# Altium PCB Communication_board.PcbDoc (part 1 of 2)
Units mm, origin at the board's own origin, x right, y up, seen from the top; angles counter-clockwise.
Board outline 123 x 68.2 mm, 6 copper layers (Top Layer, Mid-Layer 1, Internal Plane 1, Mid-Layer 2, Mid-Layer 3, Bottom Layer); 199 components, 176 nets, 1115 pads, 336 vias.
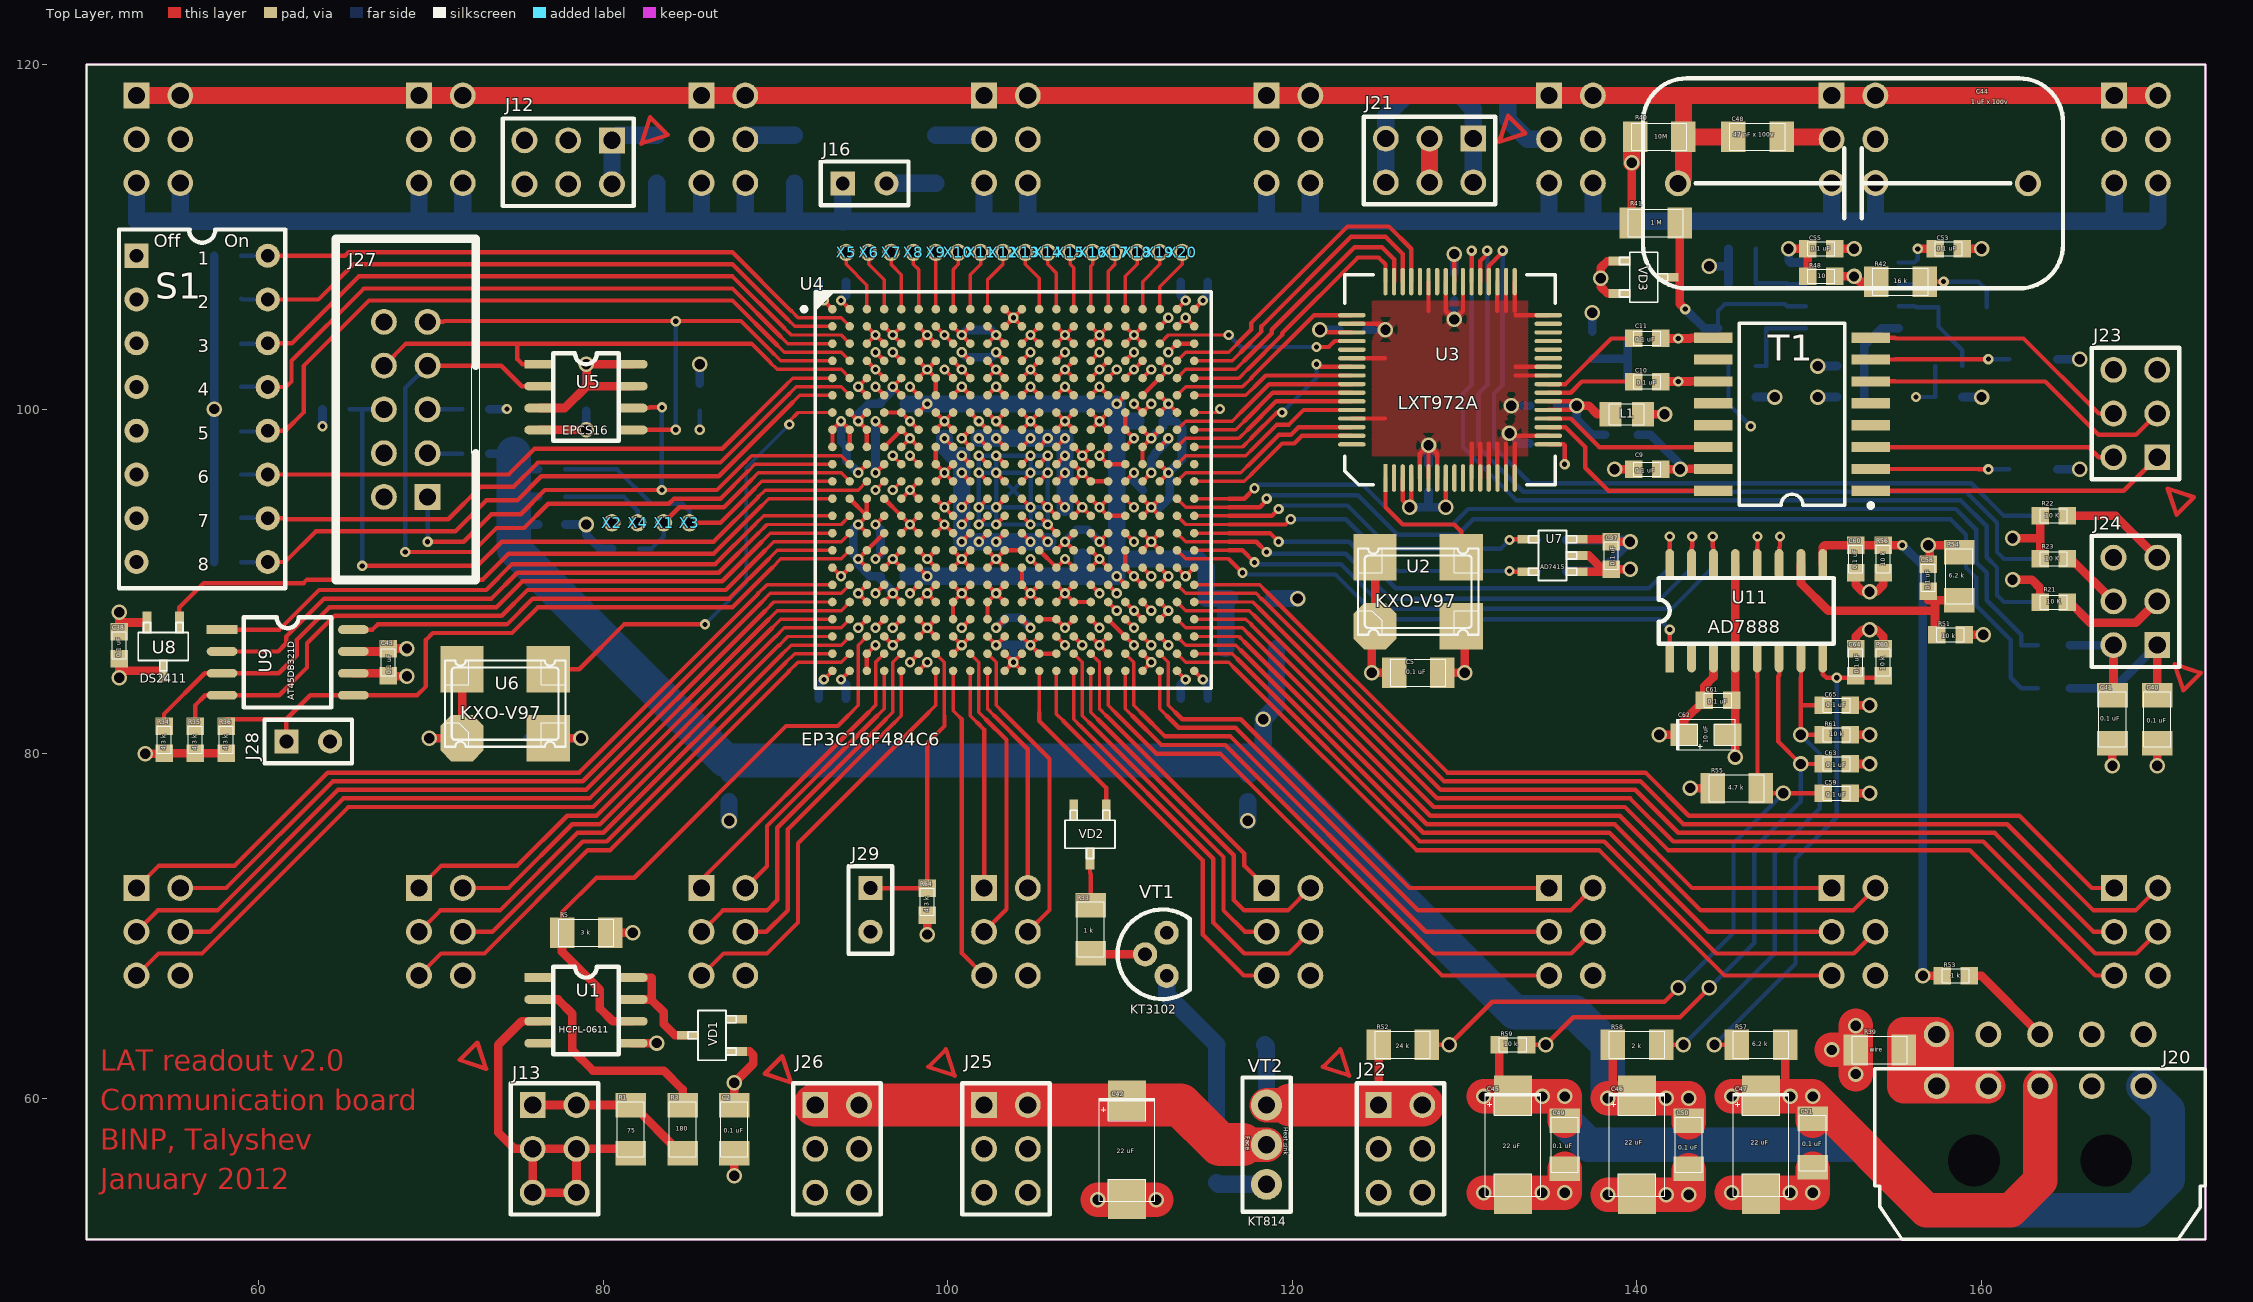
[diagram p0: Top Layer view]
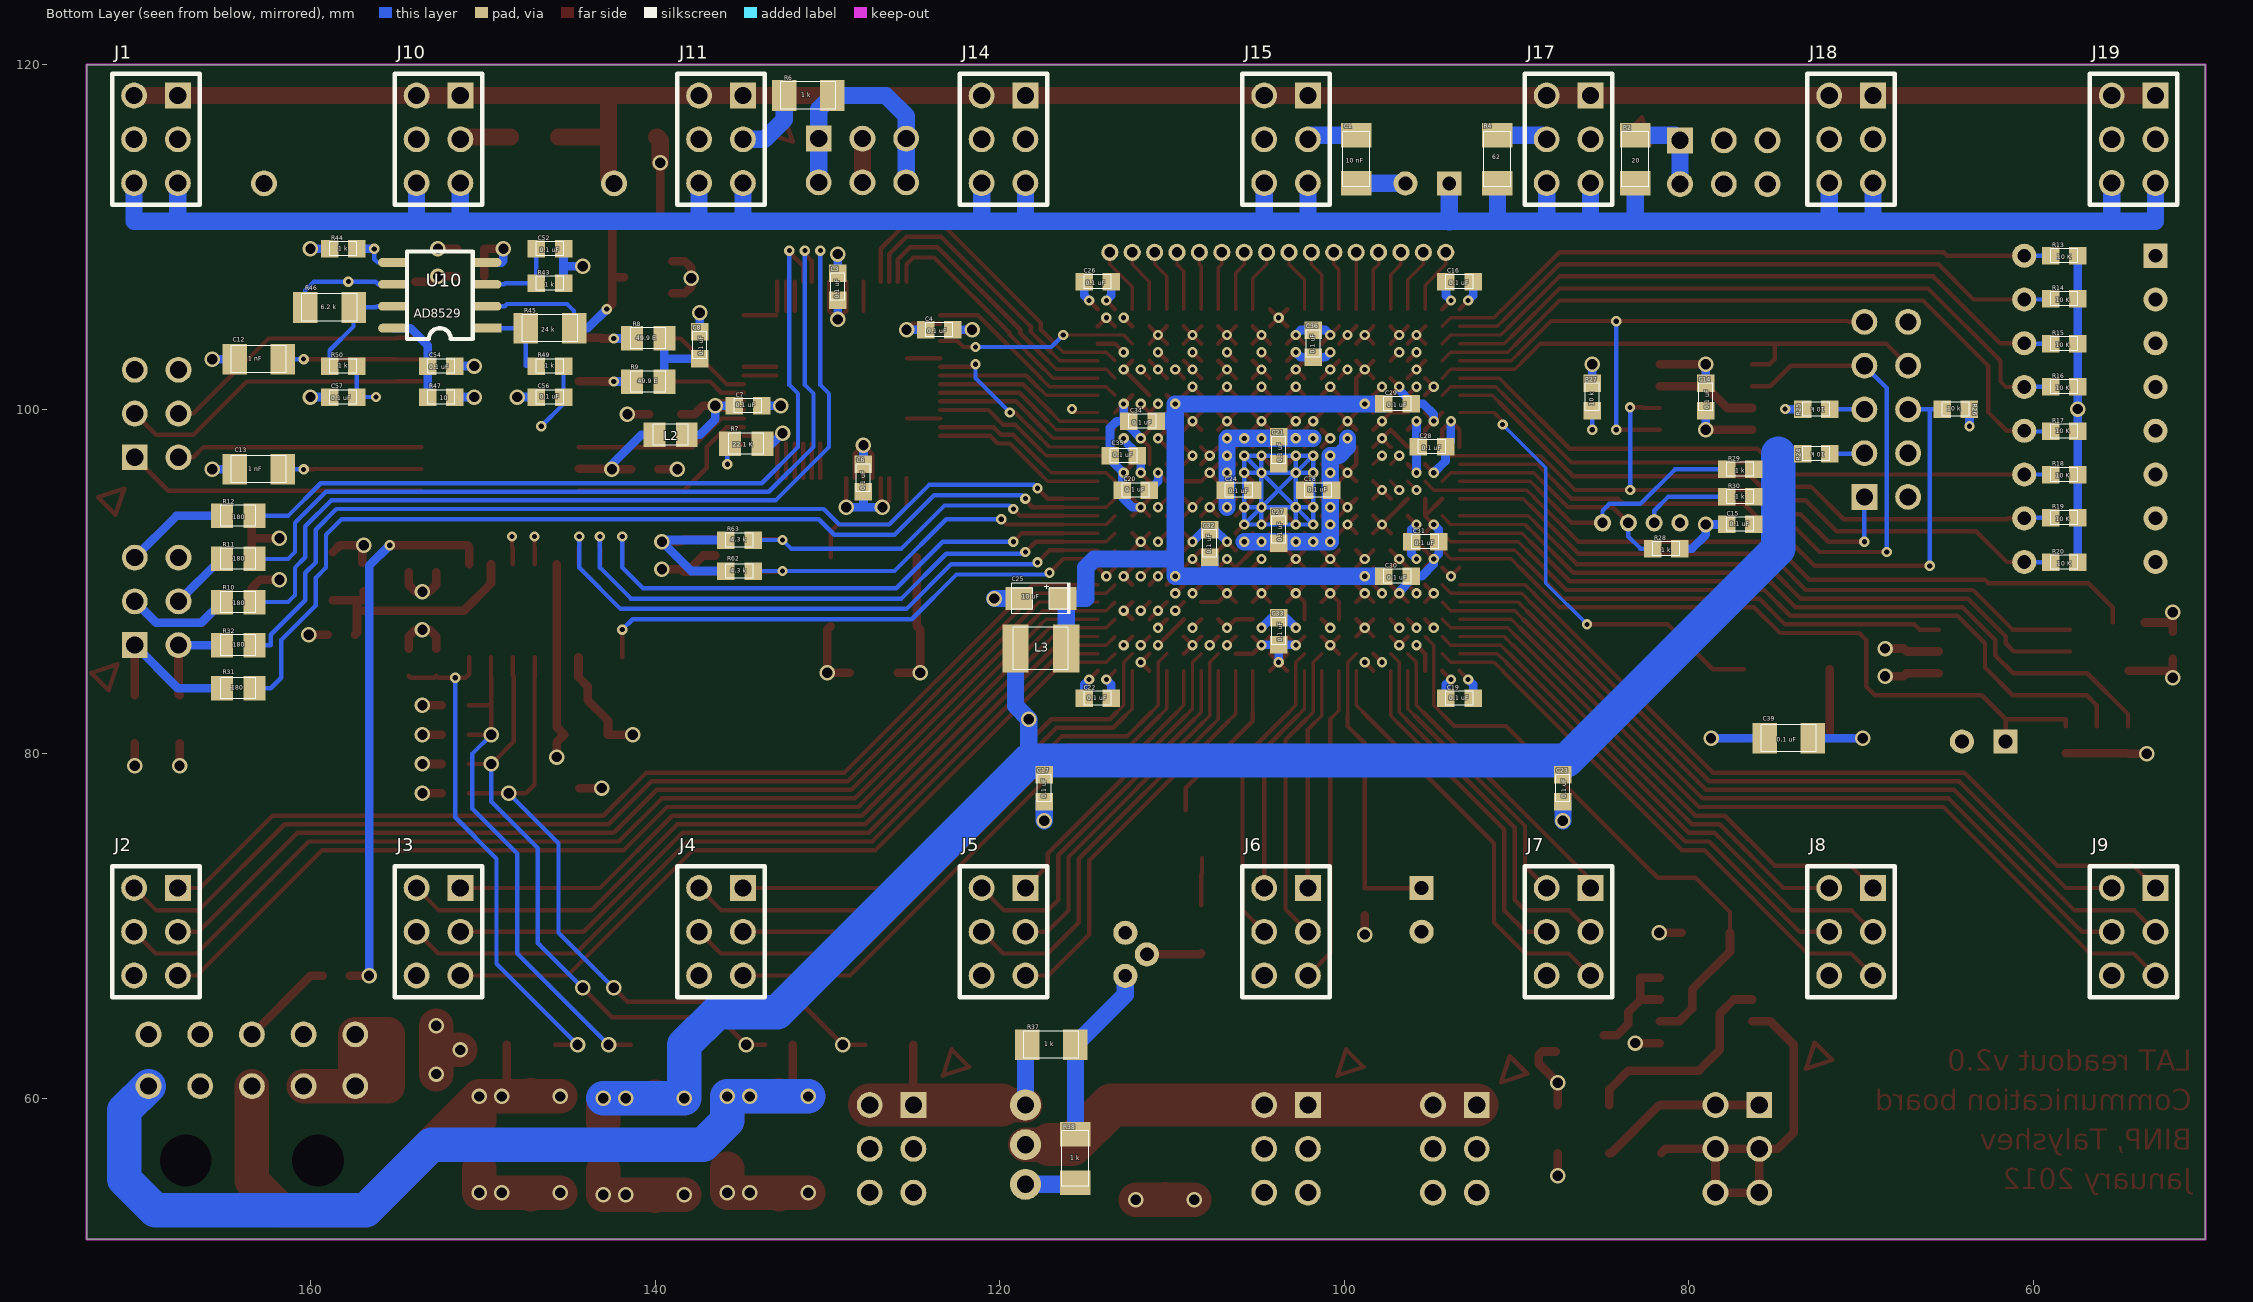
[diagram p1: Bottom Layer view, seen from below]
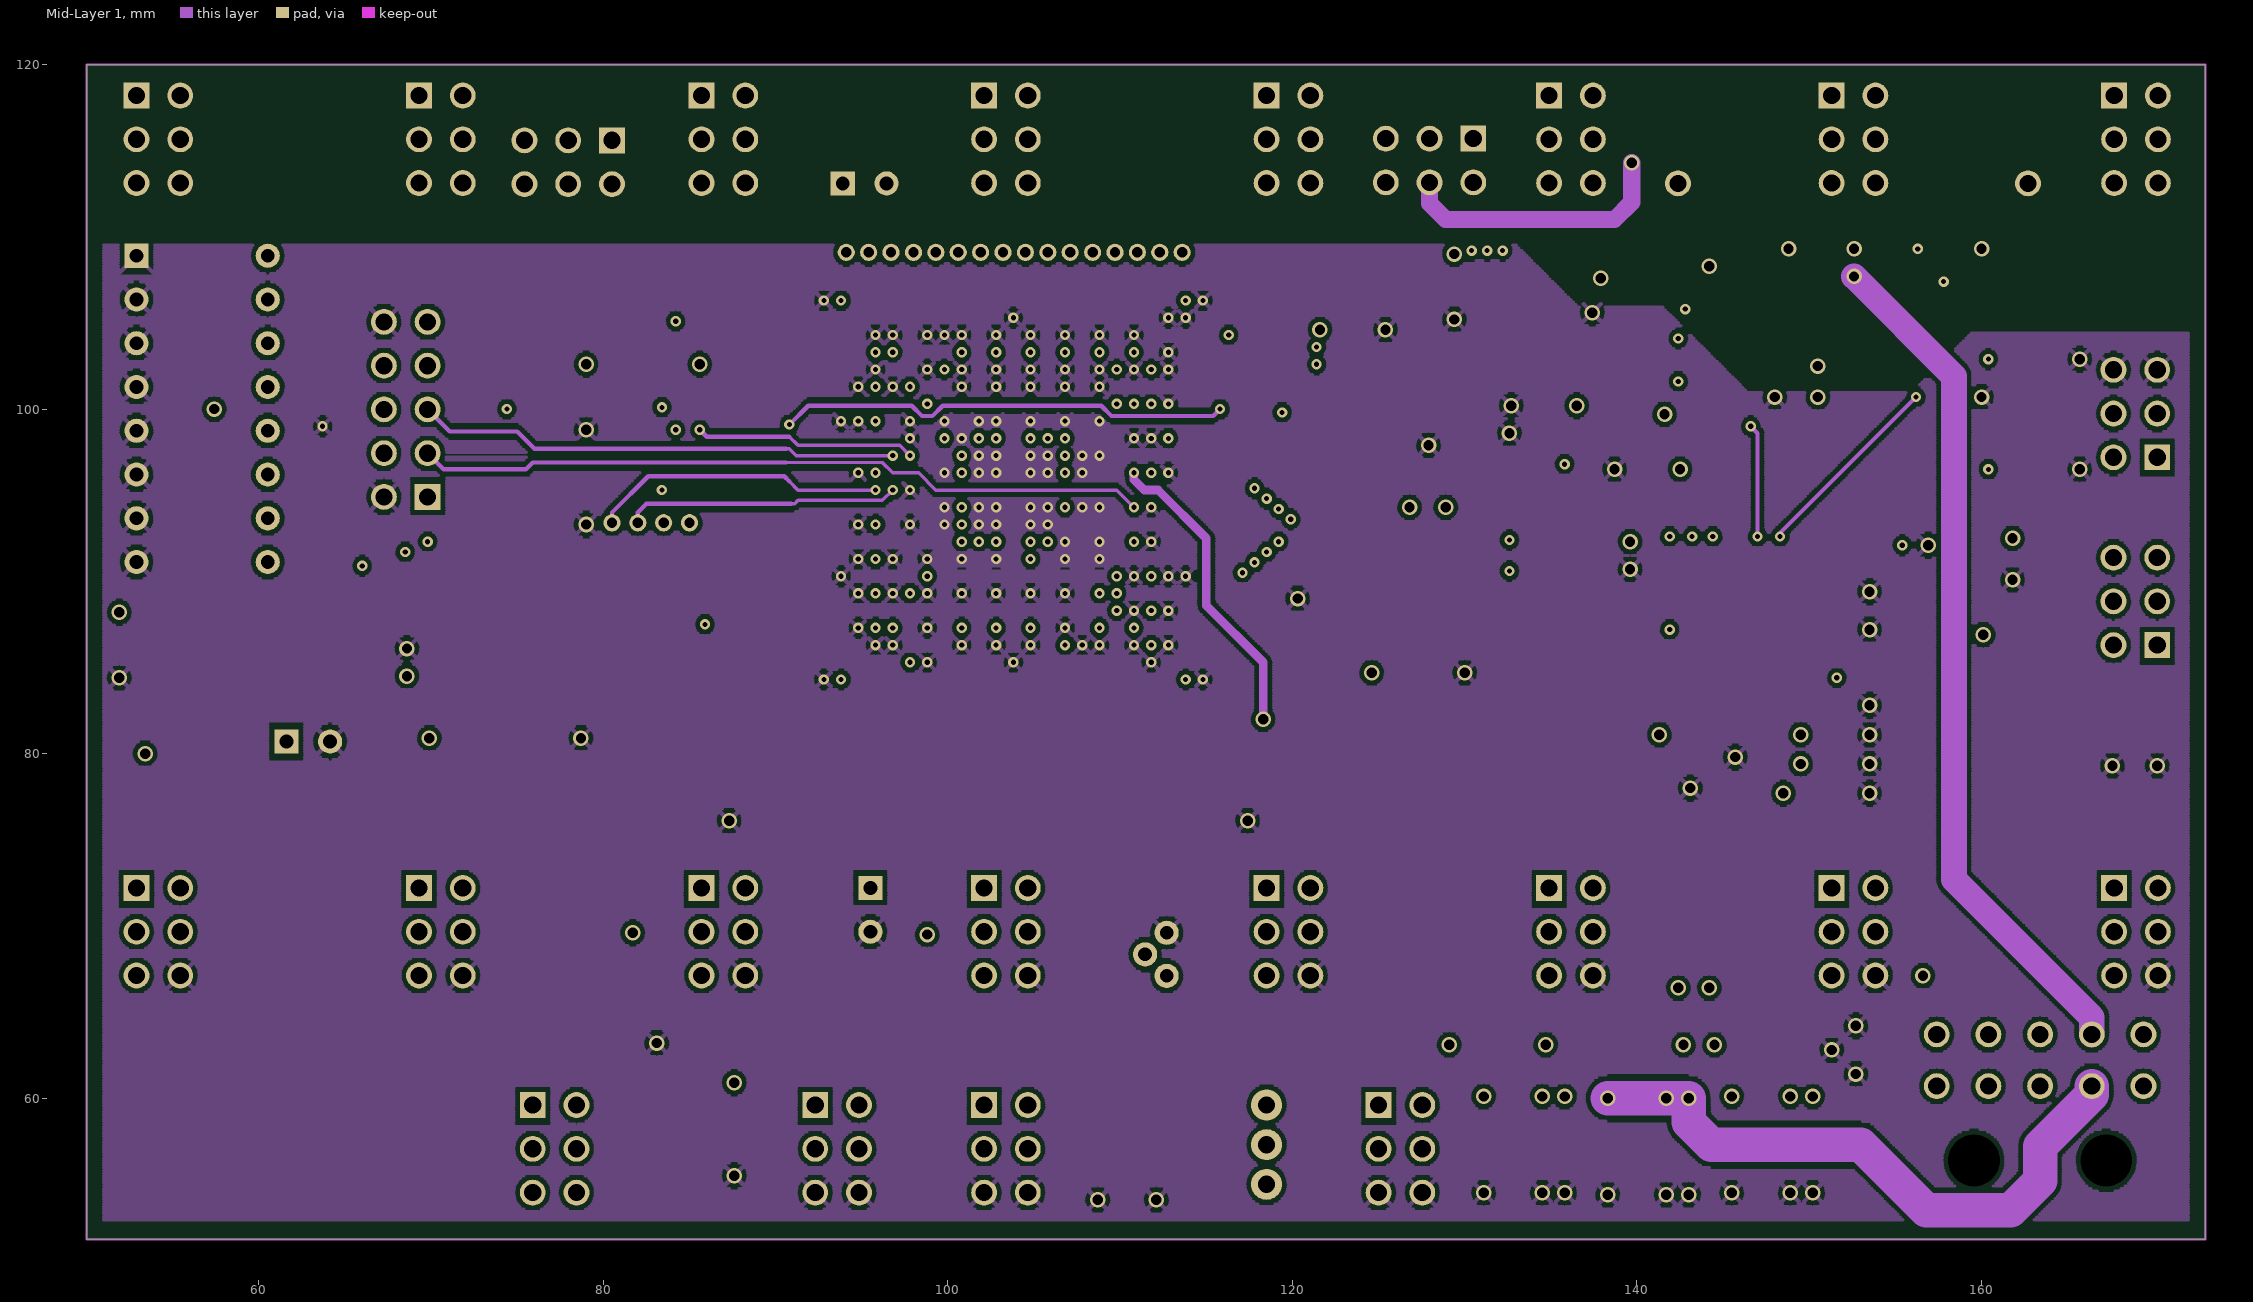
[diagram p2: Mid-Layer 1]
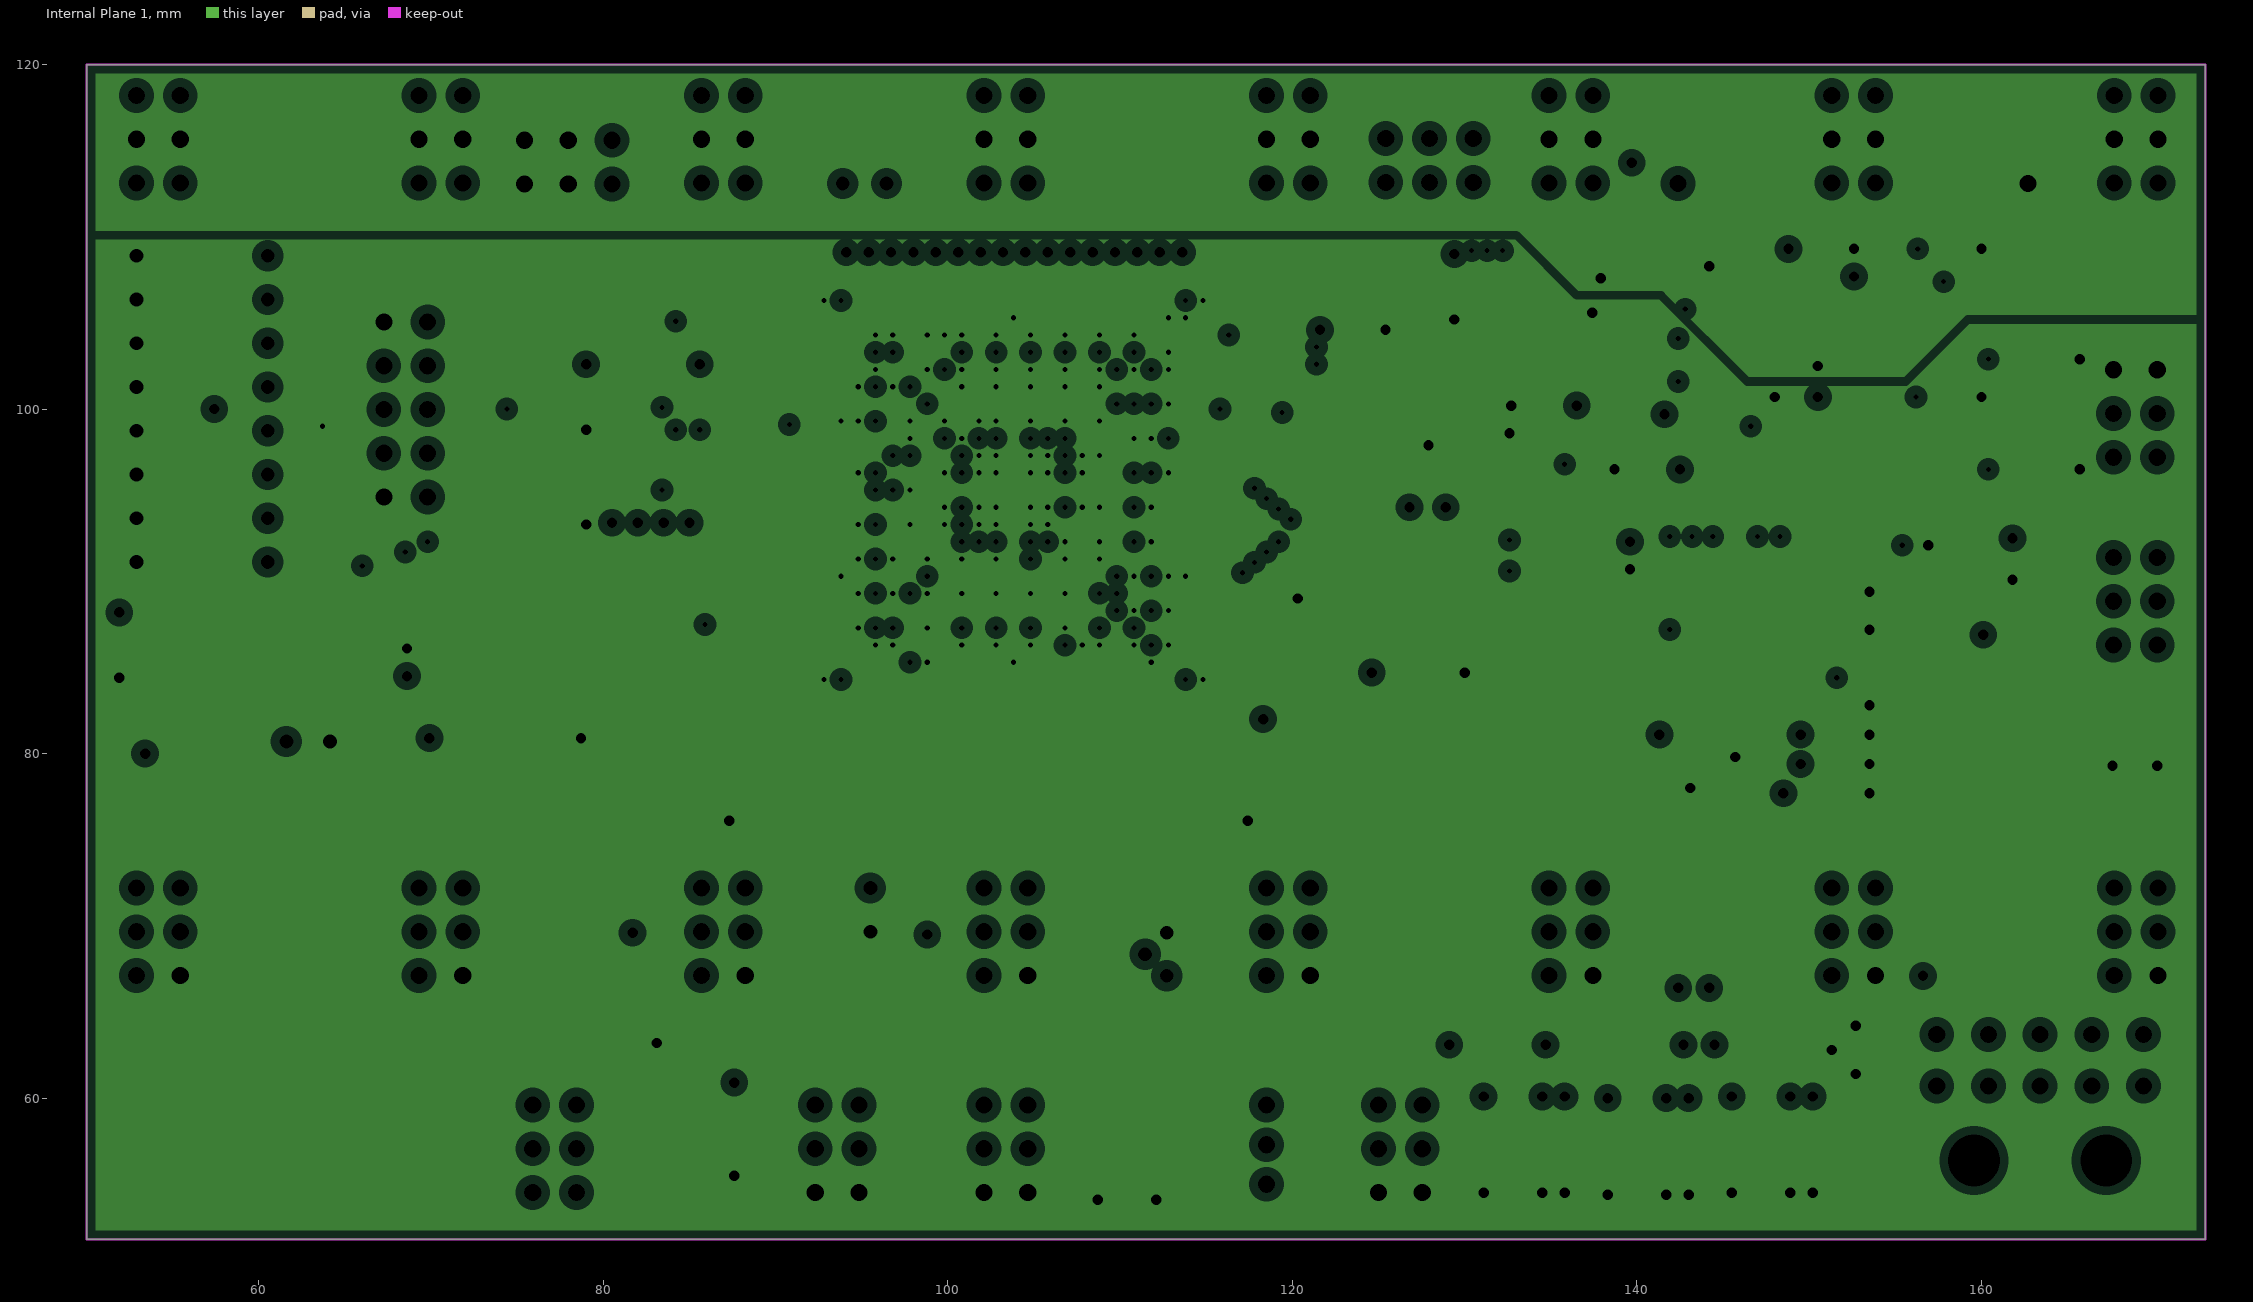
[diagram p3: Internal Plane 1, clearances drawn from the general rule]
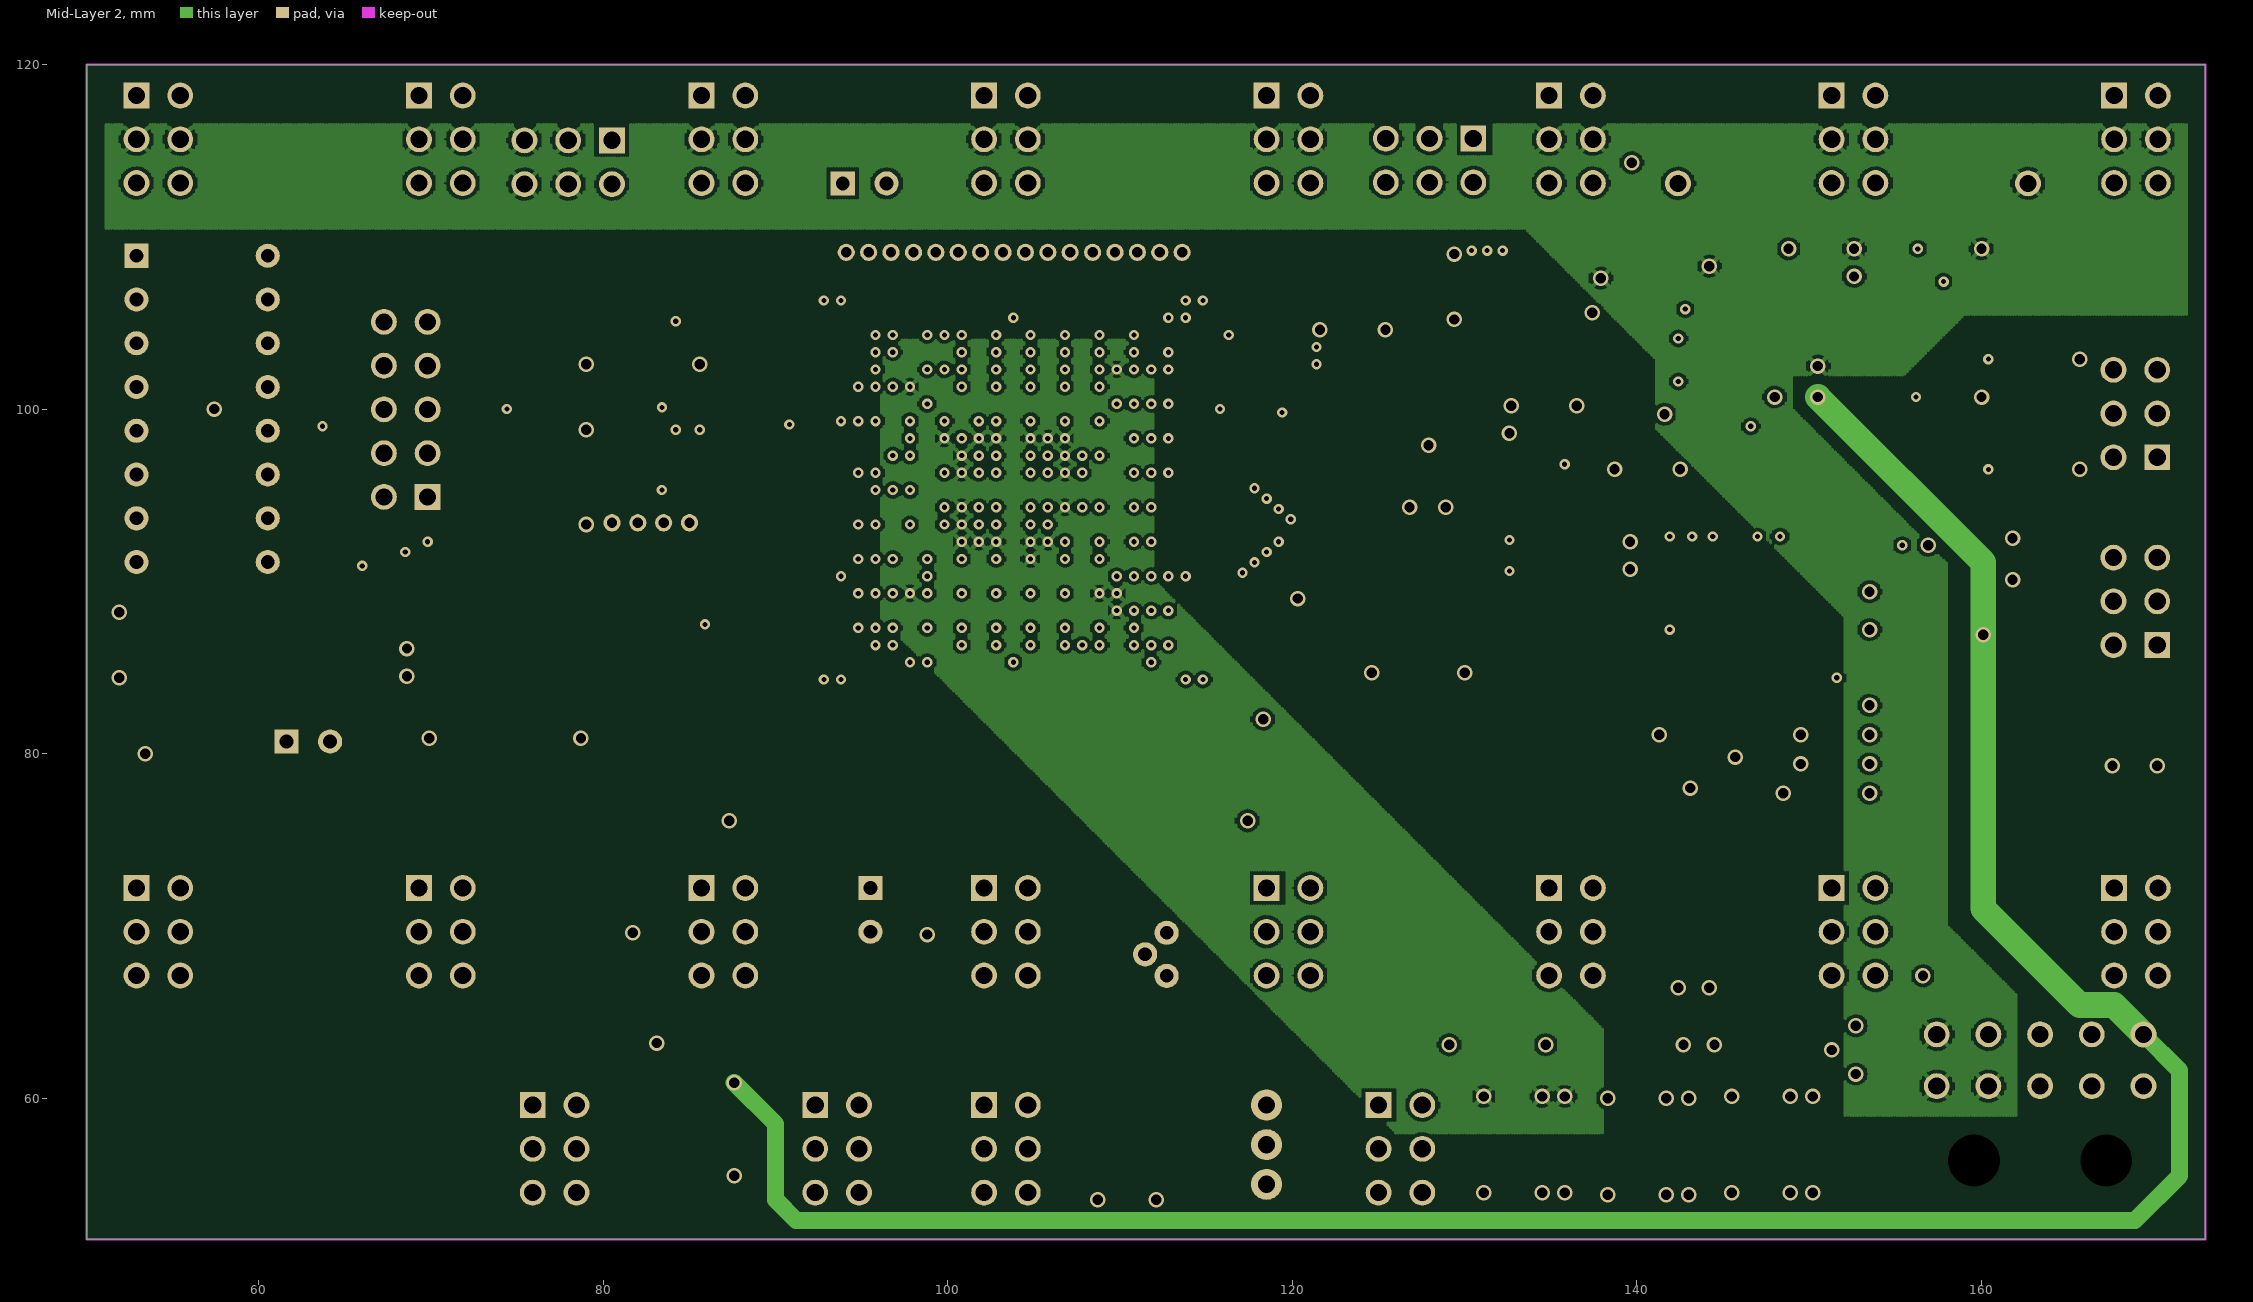
[diagram p4: Mid-Layer 2]
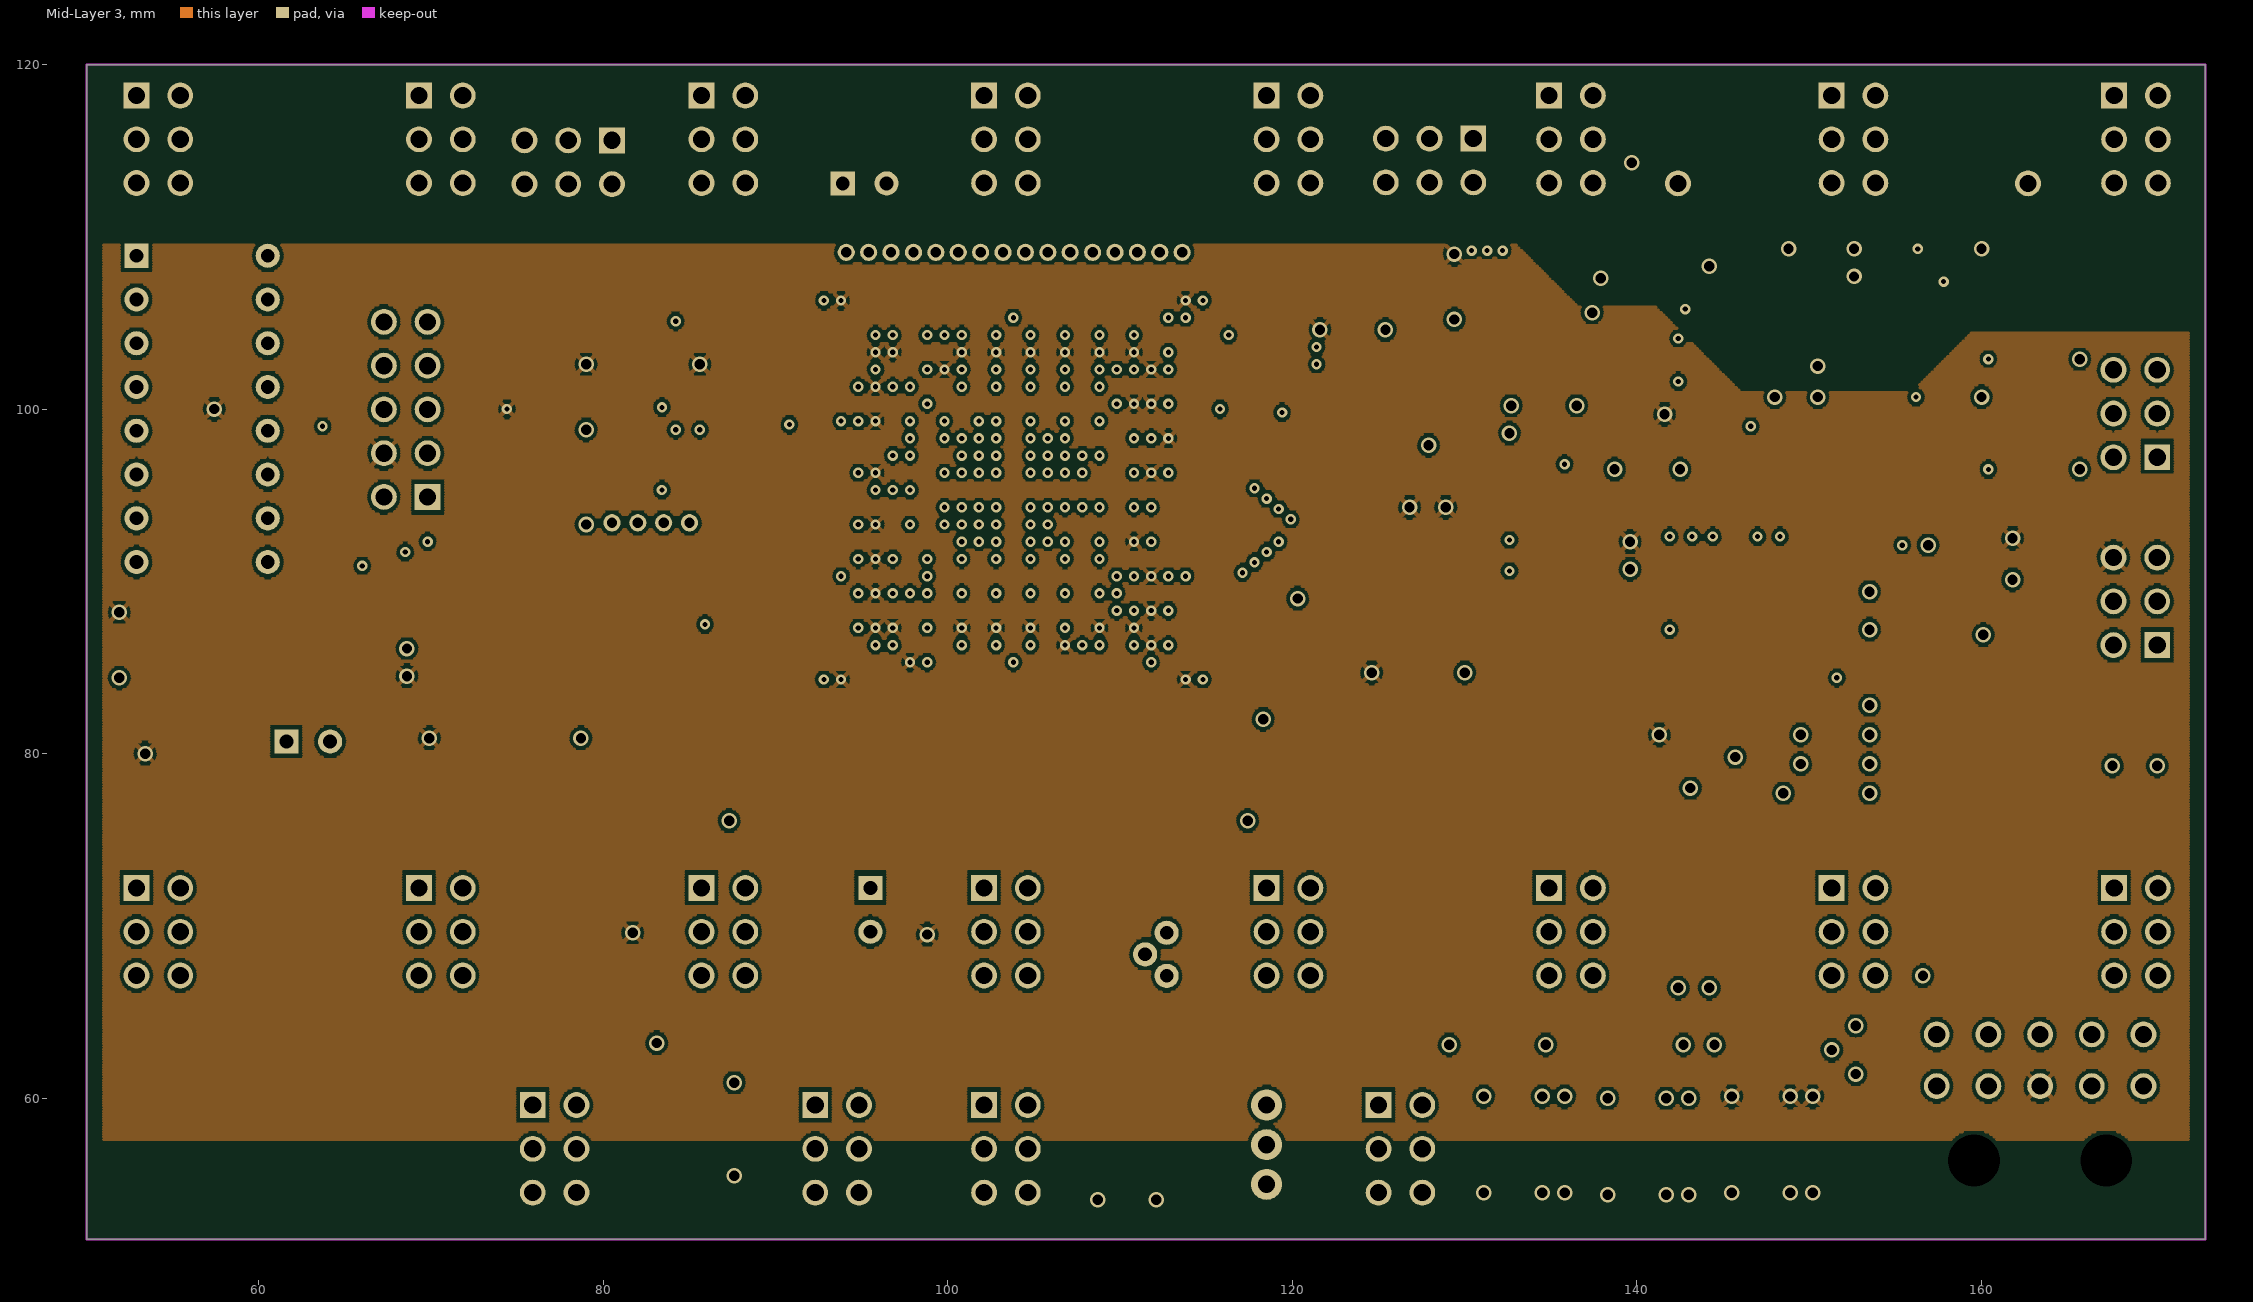
[diagram p5: Mid-Layer 3]

## Layer stack, top to bottom
Top Layer: signal copper 0.0356
Dielectric: core 0.32, FR-4, Dk 4.8
Mid-Layer 1: signal copper 0.0356
Dielectric: prepreg 0.32, FR-4, Dk 4.8
Internal Plane 1: plane copper 0.0356, net GND
Dielectric: core 0.32, FR-4, Dk 4.8
Mid-Layer 2: signal copper 0.0356
Dielectric: prepreg 0.32, FR-4, Dk 4.8
Mid-Layer 3: signal copper 0.0356
Dielectric: core 0.32, FR-4, Dk 4.8
Bottom Layer: signal copper 0.0356

## Board outline
50,51.8 50,120 173,120 173,51.8 50,51.8

## Design rules (kind name [scope] priority, off if disabled: settings)
Clearance Clearance_mid1_poly [(InPolygon AND OnLayer('Mid-Layer 1')) vs (OnLayer('Mid-Layer 1') OR OnLayer('Multi-Layer'))] p1: gap=0.254
Clearance Clearance_bottom_poly [(InPolygon AND OnLayer('Bottom Layer')) vs (OnLayer('Bottom Layer') OR OnLayer('Multi-Layer'))] p2: gap=0.254
Clearance Clearance_top_poly [(InPolygon AND OnLayer('Top Layer')) vs (OnLayer('Top Layer') OR OnLayer('Multi-Layer'))] p3: gap=0.254
Clearance Clearance_int1 [OnLayer('Internal Plane 1') vs (OnLayer('Internal Plane 1') OR OnLayer('Multi-Layer'))] p4: gap=0.2
Clearance Clearance_bot [OnLayer('Bottom Layer') vs (OnLayer('Bottom Layer') OR OnLayer('Multi-Layer'))] p5: gap=0.12
Clearance Clearance_mid3 [OnLayer('Mid-Layer 3') vs (OnLayer('Mid-Layer 3') OR OnLayer('Multi-Layer'))] p6: gap=0.2
Clearance Clearance_mid2 [OnLayer('Mid-Layer 2') vs (OnLayer('Mid-Layer 2') OR OnLayer('Multi-Layer'))] p7: gap=0.2
Clearance Clearance_mid1 [OnLayer('Mid-Layer 1') vs (OnLayer('Mid-Layer 1') OR OnLayer('Multi-Layer'))] p8: gap=0.2
Clearance Clearance_top [OnLayer('Top Layer') vs (OnLayer('Top Layer') OR OnLayer('Multi-Layer'))] p9: gap=0.12
HoleSize [All] p1: absolutevalues=TRUE maxlimit=3.048 minlimit=0.025 maxpercent=80.000 minpercent=20.000
MinimumSolderMaskSliver [All] p1: minsoldermaskwidth=0.178
PlaneClearance [All] p1: clearance=0.508
PlaneConnect [All] p1: planeconnectstyle=Relief reliefexpansion=0.508 reliefentries=4 reliefconductorwidth=0.254 reliefairgap=0.254
PolygonConnect [All] p1: connectstyle=Relief reliefconductorwidth=0.254 reliefentries=4 polygonreliefangle="45 Angle"
RoomDefinition PowerMeasure [InComponentClass('PowerMeasure')] p1: confinementstyle=ConfineOut formatcopy=TRUE lockcomponents=FALSE outline 81.28,162.56 109.22,162.56 109.22,167.64 81.28,167.64
RoomDefinition Power [InComponentClass('Power')] p2: confinementstyle=ConfineOut formatcopy=TRUE lockcomponents=FALSE outline 81.28,154.94 109.22,154.94 109.22,160.02 81.28,160.02
RoomDefinition Misc [InComponentClass('Misc')] p3: confinementstyle=ConfineOut formatcopy=TRUE lockcomponents=FALSE outline 81.28,170.18 109.22,170.18 109.22,175.26 81.28,175.26
RoomDefinition FPGA [InComponentClass('FPGA')] p4: confinementstyle=ConfineOut formatcopy=TRUE lockcomponents=FALSE outline 50.8,162.56 78.74,162.56 78.74,167.64 50.8,167.64
RoomDefinition Ethernet [InComponentClass('Ethernet')] p5: confinementstyle=ConfineOut formatcopy=TRUE lockcomponents=FALSE outline 50.8,154.94 78.74,154.94 78.74,160.02 50.8,160.02
RoomDefinition DigitalPart [InComponentClass('DigitalPart')] p6: confinementstyle=ConfineOut formatcopy=TRUE lockcomponents=FALSE outline 50.8,170.18 78.74,170.18 78.74,175.26 50.8,175.26
RoutingVias [All] p1: holewidth=0.3 width=0.6 viastyle="Through Hole" minholewidth=0.25 minwidth=0.5 maxholewidth=3 maxwidth=4
SilkToSilkClearance [All] p1: silktosilkclearance=0.025
SilkscreenOverComponentPads [All] p1: minsilkscreentomaskgap=0.102
SolderMaskExpansion [All] p1: expansion=0.102
Width [All] p1: maxlimit=10.16 minlimit=0.2 preferedwidth=0.508
22 further rules are at their usual default settings.

## Classes and differential pairs
net class ETHTXD[3..0]: ETHTXD0 ETHTXD1 ETHTXD2 ETHTXD3
net class ETHRXD[3..0]: ETHRXD0 ETHRXD1 ETHRXD2 ETHRXD3
net class ETHADDRSELECT[7..0]: ETHADDRSELECT0 ETHADDRSELECT1 ETHADDRSELECT2 ETHADDRSELECT3 ETHADDRSELECT4 ETHADDRSELECT5 ETHADDRSELECT6 ETHADDRSELECT7
component class Power: C44 C45 C46 C47 C48 C49 C50 C51 R39 R40
component class PowerMeasure: C52 C53 C54 C55 C56 C57 C58 C59 C60 C61 C62 C63 C64 C65 R41 R42 R43 R44 R45 R46 R47 R48 R49 R50 R51 R52 R53 R54 R55 R56 R57 R58 R59 R60 R61 U10 U11 VD3
component class Misc: C37 C38 C39 C40 C41 C42 C43 J28 R31 R32 R33 R34 R35 R36 R37 R38 R62 R63 U6 U7 U8 U9 VD2 VT1 VT2
component class FPGA: C14 C15 C16 C17 C18 C19 C20 C21 C22 C23 C24 C25 C26 C27 C28 C29 C30 C31 C32 C33 C34 C35 C36 J27 L3 R24 R25 R26 R27 R28 R29 R30 U4 U5 X1 X2 X3 X4 X5 X6 X7 X8 X9 X10 X11 X12 X13 X14 X15 X16 X17 X18 X19 X20
component class Ethernet: C3 C4 C5 C6 C7 C8 C9 C10 C11 C12 C13 L1 L2 R7 R8 R9 R10 R11 R12 R13 R14 R15 R16 R17 R18 R19 R20 R21 R22 R23 S1 T1 U2 U3
component class DigitalPart: C1 C2 J1 J2 J3 J4 J5 J6 J7 J8 J9 J10 J11 J12 J13 J14 J15 J16 J17 J18 J19 J20 J21 J22 J23 J24 J25 J26 J29 R1 R2 R3 R4 R5 R6 R64 U1 VD1

## Components (designator, comment, footprint, x,y, rotation, side; value= is the part's Value field where it differs from the comment)
C1 "10 nF" 1206 99.3,114.5 r270 bottom
C2 "0.1 uF" 1206 87.6,58.2 r90 top
C3 "0.1 uF" 0603 129.4,107.1 r90 bottom
C4 "0.1 uF" 0603 123.5,104.6 r180 bottom
C5 "0.1 uF" 1206 127.3,84.7 r180 top
C6 "0.1 uF" 0603 127.9,96 r270 bottom
C7 "0.1 uF" 0603 134.6,100.2 r0 bottom
C8 "0.1 uF" 0603 137.4,103.7 r90 bottom
C9 "0.1 uF" 0603 140.6,96.5 r0 top
C10 "0.1 uF" 0603 140.6,101.6 r180 top
C11 "0.1 uF" 0603 140.6,104.1 r180 top
C12 "1 nF" 1206 163,102.9 r0 bottom
C13 "1 nF" 1206 163,96.5 r180 bottom
C14 "0.1 uF" 0603 79,100.7 r90 bottom
C15 "0.1 uF" 0603 77,93.3 r180 bottom
C16 "0.1 uF" 0603 93.3,107.4 r0 bottom
C17 "0.1 uF" 0603 117.4,78 r90 bottom
C18 "0.1 uF" 0603 101.5,95.3 r180 bottom
C19 "0.1 uF" 0603 93.3,83.2 r0 bottom
C20 "0.1 uF" 0603 112.1,95.3 r180 bottom
C21 "0.1 uF" 0603 103.8,97.6 r90 bottom
C22 "0.1 uF" 0603 114.3,83.2 r180 bottom
C23 "0.1 uF" 0603 87.3,78 r90 bottom
C24 "0.1 uF" 0603 106.1,95.3 r0 bottom
C25 "10 uF" CP3216 117.6,89 r0 bottom
C26 "0.1 uF" 0603 114.3,107.4 r180 bottom
C27 "0.1 uF" 0603 103.8,93 r270 bottom
C28 "0.1 uF" 0603 94.9,97.8 r0 bottom
C29 "0.1 uF" 0603 96.9,100.3 r0 bottom
C30 "0.1 uF" 0603 96.9,90.3 r0 bottom
C31 "0.1 uF" 0603 95.3,92.3 r0 bottom
C32 "0.1 uF" 0603 107.8,92.2 r270 bottom
C33 "0.1 uF" 0603 103.8,87.1 r90 bottom
C34 "0.1 uF" 0603 111.7,99.3 r180 bottom
C35 "0.1 uF" 0603 112.8,97.3 r180 bottom
C36 "0.1 uF" 0603 101.8,103.8 r270 bottom
C37 "0.1 uF" 0603 138.5,91.5 r90 top
C38 "0.1 uF" 0603 51.9,86.3 r90 top
C39 "0.1 uF" 1206 74.2,80.9 r180 bottom
C40 "0.1 uF" 1206 170.2,82 r90 top
C41 "0.1 uF" 1206 167.6,82 r270 top
C42 "22 uF" CP6032 110.4,57 r270 top
C43 "0.1 uF" 0603 67.5,85.3 r90 top
C44 "1 uF x 100v" CAP4 162.7,113.1 r180 top
C45 "22 uF" CP6032 132.8,57.3 r270 top
C46 "22 uF" CP6032 140,57.3 r270 top
C47 "22 uF" CP6032 147.2,57.3 r270 top
C48 "47 nF x 100v" 1206 147,115.8 r180 top
C49 "0.1 uF" 1206 135.8,57.3 r90 top
C50 "0.1 uF" 1206 143,57.3 r90 top
C51 "0.1 uF" 1206 150.2,57.4 r90 top
C52 "0.1 uF" 0603 146.1,109.3 r0 bottom
C53 "0.1 uF" 0603 158.1,109.3 r180 top
C54 "0.1 uF" 0603 152.4,102.5 r0 bottom
C55 "0.1 uF" 0603 150.7,109.3 r180 top
C56 "0.1 uF" 0603 146.1,100.7 r180 bottom
C57 "0.1 uF" 0603 158.1,100.7 r180 bottom
C58 "0.1 uF" 0603 156.9,90.2 r270 top
C59 "0.1 uF" 0603 151.6,77.7 r180 top
C60 "0.1 uF" 0603 152.7,91.3 r90 top
C61 "0.1 uF" 0603 144.7,83.1 r180 top
C62 "10 uF" CP3216 144,81.1 r0 top
C63 "0.1 uF" 0603 151.6,79.4 r180 top
C64 "0.1 uF" 0603 152.7,85.3 r270 top
C65 "0.1 uF" 0603 151.6,82.8 r180 top
J1 "PBD-6" PBD-6 167.7,118.2 r180 bottom
J2 "PBD-6" PBD-6 167.7,72.2 r180 bottom
J3 "PBD-6" PBD-6 151.3,72.2 r180 bottom
J4 "PBD-6" PBD-6 134.9,72.2 r180 bottom
J5 "PBD-6" PBD-6 118.5,72.2 r180 bottom
J6 "PBD-6" PBD-6 102.1,72.2 r180 bottom
J7 "PBD-6" PBD-6 85.7,72.2 r180 bottom
J8 "PBD-6" PBD-6 69.3,72.2 r180 bottom
J9 "PBD-6" PBD-6 52.9,72.2 r180 bottom
J10 "PBD-6" PBD-6 151.3,118.2 r180 bottom
J11 "PBD-6" PBD-6 134.9,118.2 r180 bottom
J12 "PLD-6" PLD-6 80.5,115.6 r270 top
J13 "PLD-6" PLD-6 75.9,59.6 r0 top
J14 "PBD-6" PBD-6 118.5,118.2 r180 bottom
J15 "PBD-6" PBD-6 102.1,118.2 r180 bottom
J16 "JUMPER 1-2" 2SIP 93.9,113.1 r90 top
J17 "PBD-6" PBD-6 85.7,118.2 r180 bottom
J18 "PBD-6" PBD-6 69.3,118.2 r180 bottom
J19 "PBD-6" PBD-6 52.9,118.2 r180 bottom
J20 "MICROFIT-10" MICROFIT10 169.4,60.7 r0 top
J21 "PLD-6" PLD-6 130.5,115.7 r270 top
J22 "PLD-6" PLD-6 125,59.6 r0 top
J23 "PLD-6" PLD-6 170.2,97.2 r180 top
J24 "PLD-6" PLD-6 170.2,86.3 r180 top
J25 "PLD-6" PLD-6 102.1,59.6 r0 top
J26 "PLD-6" PLD-6 92.3,59.6 r0 top
J27 "BH-10" BH10 69.8,94.9 r180 top
J28 "JUMPER 1-2" 2SIP 61.6,80.7 r90 top
J29 "JUMPER 1-2" 2SIP 95.5,72.2 r0 top
L1 "Inductor" 0805 139.4,99.7 r180 top
L2 "Inductor" 0805 139.1,98.5 r0 bottom
L3 "LQH32 100mkH" 1210 117.6,86.1 r180 bottom
R1 "75" 1206 81.6,58.2 r90 top
R2 "20" 1206 83.1,114.5 r270 bottom
R3 "180" 1206 84.6,58.2 r270 top
R4 "62" 1206 91.1,114.5 r270 bottom
R5 "3 k" 1206 79,69.6 r180 top
R6 "1 k" 1206 131.1,118.2 r0 bottom
R7 "22.1 K" 0805 134.7,98 r180 bottom
R8 "49.9 E" 0805 140.4,104.1 r0 bottom
R9 "49.9 E" 0805 140.4,101.6 r180 bottom
R10 "180" 0805 164.2,88.8 r0 bottom
R11 "180" 0805 164.2,91.3 r0 bottom
R12 "180" 0805 164.2,93.8 r0 bottom
R13 "10 K" 0603 58.2,108.9 r180 bottom
R14 "10 K" 0603 58.2,106.4 r180 bottom
R15 "10 K" 0603 58.2,103.8 r180 bottom
R16 "10 K" 0603 58.2,101.3 r180 bottom
R17 "10 K" 0603 58.2,98.7 r180 bottom
R18 "10 K" 0603 58.2,96.2 r180 bottom
R19 "10 K" 0603 58.2,93.7 r180 bottom
R20 "10 K" 0603 58.2,91.1 r180 bottom
R21 "10 K" 0603 164.2,88.8 r180 top
R22 "10 K" 0603 164.2,93.8 r0 top
R23 "10 K" 0603 164.2,91.3 r0 top
R24 "10 k" 0603 72.6,97.4 r0 bottom
R25 "10 k" 0603 72.6,100 r0 bottom
R26 "10 k" 0603 64.5,100 r180 bottom
R27 "10 k" 0603 85.6,100.7 r90 bottom
R28 "1 k" 0603 81.3,91.9 r180 bottom
R29 "1 k" 0603 77,96.5 r180 bottom
R30 "1 k" 0603 77,94.9 r180 bottom
R31 "180" 0805 164.2,83.8 r0 bottom
R32 "180" 0805 164.2,86.3 r0 bottom
R33 "1 k" 1206 108.3,69.8 r270 top
R34 "4.3 k" 0603 54.5,80.8 r270 top
R35 "4.3 k" 0603 56.3,80.8 r270 top
R36 "4.3 k" 0603 58.1,80.8 r270 top
R37 "1 k" 1206 117,63.1 r0 bottom
R38 "1 k" 1206 115.6,56.5 r270 bottom
R39 "wire" 1206 154.103,62.797 r0 top
R40 "10M" 1206 141.3,115.8 r0 top
R41 "1 M" 1206 141.1,110.8 r0 top
R42 "16 k" 1206 155.3,107.4 r0 top
R43 "1 k" 0603 146.1,107.3 r0 bottom
R44 "1 k" 0603 158.1,109.3 r180 bottom
R45 "24 k" 1206 146.1,104.7 r0 bottom
R46 "6.2 k" 1206 158.9,105.9 r180 bottom
R47 "10" 0603 152.4,100.7 r0 bottom
R48 "10" 0603 150.7,107.7 r180 top
R49 "1 k" 0603 146.1,102.5 r0 bottom
R50 "1 k" 0603 158.1,102.5 r180 bottom
R51 "10 k" 0603 158.2,86.9 r0 top
R52 "24 k" 1206 126.4,63.1 r180 top
R53 "1 k" 0603 158.5,67.1 r0 top
R54 "6.2 k" 1206 158.7,90.3 r270 top
R55 "4.7 k" 1206 145.8,78 r0 top
R56 "10 k" 0603 154.3,91.3 r90 top
R57 "6.2 k" 1206 147.2,63.1 r0 top
R58 "2 k" 1206 140,63.1 r180 top
R59 "10 k" 0603 132.8,63.1 r180 top
R60 "10 k" 0603 154.3,85.3 r270 top
R61 "10 k" 0603 151.6,81.1 r180 top
R62 "4.3 k" 0603 135.1,90.6 r0 bottom
R63 "4.3 k" 0603 135.1,92.4 r0 bottom
R64 "4.3 k" 0603 98.8,71.4 r90 top
S1 "SW DIP8" SWD1-8 52.9,108.9 r0 top
T1 "TG110-S050N2" SO-G16/G6.9 149,99.7 r90 top
U1 "HCPL-0611" 8SOIC150 76.3,67 r0 top
U2 "KXO-V97" KXO-97 124.8,87.4 r0 top
U3 "LXT972A" TQFP64 125.4,96 r90 top
U4 "EP3C16F484C6" FBGA484-3 103.8,95.3 r0 top
U5 "EPCS16" 8SOIC150 76.3,102.6 r0 top
U6 "KXO-V97" KXO-97 71.8,80.9 r0 top
U7 "AD7415" SOT-23-5 136.5,91.5 r90 top
U8 "DS2411" SOT-23 55.9,85.4 r180 top
U9 "AT45DB321D" 8SOIC208 57.865,87.2 r0 top
U10 "AD8529" 8SOIC150 149.8,104.7 r0 bottom
U11 "AD7888" 16SOIC150 141.9,85.6 r90 top
VD1 "BAV99" SOT-23 85.5,62.2 r90 top
VD2 "BAV99" SOT-23 109.7,74.5 r180 top
VD3 "BAV99" SOT-23 141.2,109.1 r270 top
VT1 "KT3102" TRANS-KT3102M 112.7,67.1 r90 top
VT2 "KT814" TRANS-KT814 118.5,57.3 r270 top
X1 "Tmp" DRL06 83.5,93.4 r0 top
X2 "Tmp" DRL06 80.5,93.4 r0 top
X3 "Tmp" DRL06 85,93.4 r0 top
X4 "Tmp" DRL06 82,93.4 r0 top
X5 "Tmp" DRL06 94.1,109.1 r0 top
X6 "Tmp" DRL06 95.4,109.1 r0 top
X7 "Tmp" DRL06 96.7,109.1 r0 top
X8 "Tmp" DRL06 98,109.1 r0 top
X9 "Tmp" DRL06 99.3,109.1 r0 top
X10 "Tmp" DRL06 100.6,109.1 r90 top
X11 "Tmp" DRL06 101.9,109.1 r0 top
X12 "Tmp" DRL06 103.2,109.1 r90 top
X13 "Tmp" DRL06 104.5,109.1 r90 top
X14 "Tmp" DRL06 105.8,109.1 r90 top
X15 "Tmp" DRL06 107.1,109.1 r90 top
X16 "Tmp" DRL06 108.4,109.1 r90 top
X17 "Tmp" DRL06 109.7,109.1 r90 top
X18 "Tmp" DRL06 111,109.1 r90 top
X19 "Tmp" DRL06 112.3,109.1 r90 top
X20 "Tmp" DRL06 113.6,109.1 r90 top

## Footprints (in the part's own frame and the unit in brackets; to place one, negate y for a bottom-side part, rotate by r counter-clockwise, add the part's x,y. Pads: shape width x height; smd on the part's side, far side on the other; paste and mask are expansions set on the pad)
2SIP [mm]
  rect 1.4x1.4 hole 0.8: 1(0,0)
  round 1.4 hole 0.8: 2(0,-2.54)
  silkscreen extent -1.27,-3.81 1.27,1.27
8SOIC150 [mil]
  rect 70x20 smd: 1(0,0)
  oval 70x20 smd: 2(0,-50) 3(0,-100) 4(0,-150) 5(212,-150) 6(212,-100) 7(212,-50) 8(212,0)
  silkscreen extent 31,-175 181,25
8SOIC208 [mil]
  rect 70x20 smd: 1(0,0)
  oval 70x20 smd: 2(0,-50) 3(0,-100) 4(0,-150) 5(300,-150) 6(300,-100) 7(300,-50) 8(300,0)
  silkscreen extent 50,-178 250,28, body extent 50,-178 250,28, height 85
16SOIC150 [mil]
  rect 70x20 smd: 1(0,0)
  oval 70x20 smd: 2(0,-50) 3(0,-100) 4(0,-150) 5(0,-200) 6(0,-250) 7(0,-300) 8(0,-350) 9(212,-350) 10(212,-300) 11(212,-250) 12(212,-200) 13(212,-150) 14(212,-100) 15(212,-50) 16(212,0)
  silkscreen extent 31,-375 181,25, body extent 26,-380 186,30, height 59
0603 [mil]
  rect 40x40 smd: 1(-31,0) 2(31,0)
  silkscreen extent -31,-16 31,16, body extent -32,-17 32,17, height 32
0805 [mil]
  rect 50x56 smd: 1(-37,0) 2(37,0)
  silkscreen extent -40,-24 40,24, body extent -41,-25 41,25, height 50
1206 [mil]
  rect 56x70 smd: 1(-55,0) 2(55,0)
  silkscreen extent -63,-31 63,31, body extent -64,-32 64,32, height 50
1210 [mil]
  rect 60x110 smd: 1(-58,0) 2(58,0)
  silkscreen extent -63,-49 63,49
BH10 [mm]
  rect 1.5x1.5 hole 1: 1(0,0)
  round 1.5 hole 1: 2(2.54,0) 3(0,-2.54) 4(2.54,-2.54) 5(0,-5.08) 6(2.54,-5.08) 7(0,-7.62) 8(2.54,-7.62) 9(0,-10.16) 10(2.54,-10.16)
  silkscreen extent -3.02,-14.99 5.33,4.83
CAP4 [mm]
  round 1.5 hole 1: 1(0,0) 2(20.32,0)
  silkscreen extent -2.03,-6.1 22.35,6.1, body extent -2.04,-6.11 22.36,6.11, height 30.48
CP3216 [mil]
  rect 62x52 smd: +(-50,0) -(50,0)
  silkscreen extent -67,-35 67,35, body extent -68,-36 68,36, height 64
CP6032 [mil]
  rect 91x86 smd: +(-113,0) -(113,0)
  silkscreen extent -118,-63 118,63, body extent -119,-64 119,64, height 100
DRL06 [mm]
  round 1 hole 0.6: DRIL(0,0)
  body extent -0.5,-0.5 0.5,0.5, height 0
FBGA484-3 [mm] "BGA, 484-Leads, Body 23x23mm, Pitch 1mm"
  round 0.5 smd: A1(-10.5,10.5) A2(-9.5,10.5) A3(-8.5,10.5) A4(-7.5,10.5) A5(-6.5,10.5) A6(-5.5,10.5) A7(-4.5,10.5) A8(-3.5,10.5) A9(-2.5,10.5) A10(-1.5,10.5) A11(-0.5,10.5) A12(0.5,10.5) A13(1.5,10.5) A14(2.5,10.5) A15(3.5,10.5) A16(4.5,10.5) A17(5.5,10.5) A18(6.5,10.5) A19(7.5,10.5) A20(8.5,10.5) A21(9.5,10.5) A22(10.5,10.5) AA1(-10.5,-9.5) AA2(-9.5,-9.5) AA3(-8.5,-9.5) AA4(-7.5,-9.5) AA5(-6.5,-9.5) AA6(-5.5,-9.5) AA7(-4.5,-9.5) AA8(-3.5,-9.5) AA9(-2.5,-9.5) AA10(-1.5,-9.5) AA11(-0.5,-9.5) AA12(0.5,-9.5) AA13(1.5,-9.5) AA14(2.5,-9.5) AA15(3.5,-9.5) AA16(4.5,-9.5) AA17(5.5,-9.5) AA18(6.5,-9.5) AA19(7.5,-9.5) AA20(8.5,-9.5) AA21(9.5,-9.5) AA22(10.5,-9.5) AB1(-10.5,-10.5) AB2(-9.5,-10.5) AB3(-8.5,-10.5) AB4(-7.5,-10.5) AB5(-6.5,-10.5) AB6(-5.5,-10.5) AB7(-4.5,-10.5) AB8(-3.5,-10.5) AB9(-2.5,-10.5) AB10(-1.5,-10.5) AB11(-0.5,-10.5) AB12(0.5,-10.5) AB13(1.5,-10.5) AB14(2.5,-10.5) AB15(3.5,-10.5) AB16(4.5,-10.5) AB17(5.5,-10.5) AB18(6.5,-10.5) AB19(7.5,-10.5) AB20(8.5,-10.5) AB21(9.5,-10.5) AB22(10.5,-10.5) B1(-10.5,9.5) B2(-9.5,9.5) B3(-8.5,9.5) B4(-7.5,9.5) B5(-6.5,9.5) B6(-5.5,9.5) B7(-4.5,9.5) B8(-3.5,9.5) B9(-2.5,9.5) B10(-1.5,9.5) B11(-0.5,9.5) B12(0.5,9.5) B13(1.5,9.5) B14(2.5,9.5) B15(3.5,9.5) B16(4.5,9.5) B17(5.5,9.5) B18(6.5,9.5) B19(7.5,9.5) B20(8.5,9.5) B21(9.5,9.5) B22(10.5,9.5) C1(-10.5,8.5) C2(-9.5,8.5) C3(-8.5,8.5) C4(-7.5,8.5) C5(-6.5,8.5) C6(-5.5,8.5) C7(-4.5,8.5) C8(-3.5,8.5) C9(-2.5,8.5) C10(-1.5,8.5) C11(-0.5,8.5) C12(0.5,8.5) C13(1.5,8.5) C14(2.5,8.5) C15(3.5,8.5) C16(4.5,8.5) C17(5.5,8.5) C18(6.5,8.5) C19(7.5,8.5) C20(8.5,8.5) C21(9.5,8.5) C22(10.5,8.5) D1(-10.5,7.5) D2(-9.5,7.5) D3(-8.5,7.5) D4(-7.5,7.5) D5(-6.5,7.5) D6(-5.5,7.5) D7(-4.5,7.5) D8(-3.5,7.5) D9(-2.5,7.5) D10(-1.5,7.5) D11(-0.5,7.5) D12(0.5,7.5) D13(1.5,7.5) D14(2.5,7.5) D15(3.5,7.5) D16(4.5,7.5) D17(5.5,7.5) D18(6.5,7.5) D19(7.5,7.5) D20(8.5,7.5) D21(9.5,7.5) D22(10.5,7.5) E1(-10.5,6.5) E2(-9.5,6.5) E3(-8.5,6.5) E4(-7.5,6.5) E5(-6.5,6.5) E6(-5.5,6.5) E7(-4.5,6.5) E8(-3.5,6.5) E9(-2.5,6.5) E10(-1.5,6.5) E11(-0.5,6.5) E12(0.5,6.5) E13(1.5,6.5) E14(2.5,6.5) E15(3.5,6.5) E16(4.5,6.5) E17(5.5,6.5) E18(6.5,6.5) E19(7.5,6.5) E20(8.5,6.5) E21(9.5,6.5) E22(10.5,6.5) F1(-10.5,5.5) F2(-9.5,5.5) F3(-8.5,5.5) F4(-7.5,5.5) F5(-6.5,5.5) F6(-5.5,5.5) F7(-4.5,5.5) F8(-3.5,5.5) F9(-2.5,5.5) F10(-1.5,5.5) F11(-0.5,5.5) F12(0.5,5.5) F13(1.5,5.5) F14(2.5,5.5) F15(3.5,5.5) F16(4.5,5.5) F17(5.5,5.5) F18(6.5,5.5) F19(7.5,5.5) F20(8.5,5.5) F21(9.5,5.5) F22(10.5,5.5) G1(-10.5,4.5) G2(-9.5,4.5) G3(-8.5,4.5) G4(-7.5,4.5) G5(-6.5,4.5) G6(-5.5,4.5) G7(-4.5,4.5) G8(-3.5,4.5) G9(-2.5,4.5) G10(-1.5,4.5) G11(-0.5,4.5) G12(0.5,4.5) G13(1.5,4.5) G14(2.5,4.5) G15(3.5,4.5) G16(4.5,4.5) G17(5.5,4.5) G18(6.5,4.5) G19(7.5,4.5) G20(8.5,4.5) G21(9.5,4.5) G22(10.5,4.5) H1(-10.5,3.5) H2(-9.5,3.5) H3(-8.5,3.5) H4(-7.5,3.5) H5(-6.5,3.5) H6(-5.5,3.5) H7(-4.5,3.5) H8(-3.5,3.5) H9(-2.5,3.5) H10(-1.5,3.5) H11(-0.5,3.5) H12(0.5,3.5) H13(1.5,3.5) H14(2.5,3.5) H15(3.5,3.5) H16(4.5,3.5) H17(5.5,3.5) H18(6.5,3.5) H19(7.5,3.5) H20(8.5,3.5) H21(9.5,3.5) H22(10.5,3.5) J1(-10.5,2.5) J2(-9.5,2.5) J3(-8.5,2.5) J4(-7.5,2.5) J5(-6.5,2.5) J6(-5.5,2.5) J7(-4.5,2.5) J8(-3.5,2.5) J9(-2.5,2.5) J10(-1.5,2.5) J11(-0.5,2.5) J12(0.5,2.5) J13(1.5,2.5) J14(2.5,2.5) J15(3.5,2.5) J16(4.5,2.5) J17(5.5,2.5) J18(6.5,2.5) J19(7.5,2.5) J20(8.5,2.5) J21(9.5,2.5) J22(10.5,2.5) K1(-10.5,1.5) K2(-9.5,1.5) K3(-8.5,1.5) K4(-7.5,1.5) K5(-6.5,1.5) K6(-5.5,1.5) K7(-4.5,1.5) K8(-3.5,1.5) K9(-2.5,1.5) K10(-1.5,1.5) K11(-0.5,1.5) K12(0.5,1.5) K13(1.5,1.5) K14(2.5,1.5) K15(3.5,1.5) K16(4.5,1.5) K17(5.5,1.5) K18(6.5,1.5) K19(7.5,1.5) K20(8.5,1.5) K21(9.5,1.5) K22(10.5,1.5) L1(-10.5,0.5) L2(-9.5,0.5) L3(-8.5,0.5) L4(-7.5,0.5) L5(-6.5,0.5) L6(-5.5,0.5) L7(-4.5,0.5) L8(-3.5,0.5) L9(-2.5,0.5) L10(-1.5,0.5) L11(-0.5,0.5) L12(0.5,0.5) L13(1.5,0.5) L14(2.5,0.5) L15(3.5,0.5) L16(4.5,0.5) L17(5.5,0.5) L18(6.5,0.5) L19(7.5,0.5) L20(8.5,0.5) L21(9.5,0.5) L22(10.5,0.5) M1(-10.5,-0.5) M2(-9.5,-0.5) M3(-8.5,-0.5) M4(-7.5,-0.5) M5(-6.5,-0.5) M6(-5.5,-0.5) M7(-4.5,-0.5) M8(-3.5,-0.5) M9(-2.5,-0.5) M10(-1.5,-0.5) M11(-0.5,-0.5) M12(0.5,-0.5) M13(1.5,-0.5) M14(2.5,-0.5) M15(3.5,-0.5) M16(4.5,-0.5) M17(5.5,-0.5) M18(6.5,-0.5) M19(7.5,-0.5) M20(8.5,-0.5) M21(9.5,-0.5) M22(10.5,-0.5) N1(-10.5,-1.5) N2(-9.5,-1.5) N3(-8.5,-1.5) N4(-7.5,-1.5) N5(-6.5,-1.5) N6(-5.5,-1.5) N7(-4.5,-1.5) N8(-3.5,-1.5) N9(-2.5,-1.5) N10(-1.5,-1.5) N11(-0.5,-1.5) N12(0.5,-1.5) N13(1.5,-1.5) N14(2.5,-1.5) N15(3.5,-1.5) N16(4.5,-1.5) N17(5.5,-1.5) N18(6.5,-1.5) N19(7.5,-1.5) N20(8.5,-1.5) N21(9.5,-1.5) N22(10.5,-1.5) P1(-10.5,-2.5) P2(-9.5,-2.5) P3(-8.5,-2.5) P4(-7.5,-2.5) P5(-6.5,-2.5) P6(-5.5,-2.5) P7(-4.5,-2.5) P8(-3.5,-2.5) P9(-2.5,-2.5) P10(-1.5,-2.5) P11(-0.5,-2.5) P12(0.5,-2.5) P13(1.5,-2.5) P14(2.5,-2.5) P15(3.5,-2.5) P16(4.5,-2.5) P17(5.5,-2.5) P18(6.5,-2.5) P19(7.5,-2.5) P20(8.5,-2.5) P21(9.5,-2.5) P22(10.5,-2.5) R1(-10.5,-3.5) R2(-9.5,-3.5) R3(-8.5,-3.5) R4(-7.5,-3.5) R5(-6.5,-3.5) R6(-5.5,-3.5) R7(-4.5,-3.5) R8(-3.5,-3.5) R9(-2.5,-3.5) R10(-1.5,-3.5) R11(-0.5,-3.5) R12(0.5,-3.5) R13(1.5,-3.5) R14(2.5,-3.5) R15(3.5,-3.5) R16(4.5,-3.5) R17(5.5,-3.5) R18(6.5,-3.5) R19(7.5,-3.5) R20(8.5,-3.5) R21(9.5,-3.5) R22(10.5,-3.5) T1(-10.5,-4.5) T2(-9.5,-4.5) T3(-8.5,-4.5) T4(-7.5,-4.5) T5(-6.5,-4.5) T6(-5.5,-4.5) T7(-4.5,-4.5) T8(-3.5,-4.5) T9(-2.5,-4.5) T10(-1.5,-4.5) T11(-0.5,-4.5) T12(0.5,-4.5) T13(1.5,-4.5) T14(2.5,-4.5) T15(3.5,-4.5) T16(4.5,-4.5) T17(5.5,-4.5) T18(6.5,-4.5) T19(7.5,-4.5) T20(8.5,-4.5) T21(9.5,-4.5) T22(10.5,-4.5) U1(-10.5,-5.5) U2(-9.5,-5.5) U3(-8.5,-5.5) U4(-7.5,-5.5) U5(-6.5,-5.5) U6(-5.5,-5.5) U7(-4.5,-5.5) U8(-3.5,-5.5) U9(-2.5,-5.5) U10(-1.5,-5.5) U11(-0.5,-5.5) U12(0.5,-5.5) U13(1.5,-5.5) U14(2.5,-5.5) U15(3.5,-5.5) U16(4.5,-5.5) U17(5.5,-5.5) U18(6.5,-5.5) U19(7.5,-5.5) U20(8.5,-5.5) U21(9.5,-5.5) U22(10.5,-5.5) V1(-10.5,-6.5) V2(-9.5,-6.5) V3(-8.5,-6.5) V4(-7.5,-6.5) V5(-6.5,-6.5) V6(-5.5,-6.5) V7(-4.5,-6.5) V8(-3.5,-6.5) V9(-2.5,-6.5) V10(-1.5,-6.5) V11(-0.5,-6.5) V12(0.5,-6.5) V13(1.5,-6.5) V14(2.5,-6.5) V15(3.5,-6.5) V16(4.5,-6.5) V17(5.5,-6.5) V18(6.5,-6.5) V19(7.5,-6.5) V20(8.5,-6.5) V21(9.5,-6.5) V22(10.5,-6.5) W1(-10.5,-7.5) W2(-9.5,-7.5) W3(-8.5,-7.5) W4(-7.5,-7.5) W5(-6.5,-7.5) W6(-5.5,-7.5) W7(-4.5,-7.5) W8(-3.5,-7.5) W9(-2.5,-7.5) W10(-1.5,-7.5) W11(-0.5,-7.5) W12(0.5,-7.5) W13(1.5,-7.5) W14(2.5,-7.5) W15(3.5,-7.5) W16(4.5,-7.5) W17(5.5,-7.5) W18(6.5,-7.5) W19(7.5,-7.5) W20(8.5,-7.5) W21(9.5,-7.5) W22(10.5,-7.5) Y1(-10.5,-8.5) Y2(-9.5,-8.5) Y3(-8.5,-8.5) Y4(-7.5,-8.5) Y5(-6.5,-8.5) Y6(-5.5,-8.5) Y7(-4.5,-8.5) Y8(-3.5,-8.5) Y9(-2.5,-8.5) Y10(-1.5,-8.5) Y11(-0.5,-8.5) Y12(0.5,-8.5) Y13(1.5,-8.5) Y14(2.5,-8.5) Y15(3.5,-8.5) Y16(4.5,-8.5) Y17(5.5,-8.5) Y18(6.5,-8.5) Y19(7.5,-8.5) Y20(8.5,-8.5) Y21(9.5,-8.5) Y22(10.5,-8.5)
  silkscreen extent -12.27,-11.5 11.5,11.5, body extent -11.5,-11.5 11.5,11.5, height 2.6
KXO-97 [mm]
  oct 2.5x2.7 smd: 1(0,0)
  rect 2.5x2.7 smd: 2(5,0) 3(5,4) 4(0,4)
  silkscreen extent -1,-0.5 6,4.5, body extent -1.06,-0.56 6.06,4.56, height 1.8
MICROFIT10 [mm]
  round 1.5 hole 3: 0(-9.84,-4.32) 0(-2.16,-4.32)
  round 1.5 hole 1: 1(0,0) 2(-3,0) 3(-6,0) 4(-9,0) 5(-12,0) 6(0,3) 7(-3,3) 8(-6,3) 9(-9,3) 10(-12,3)
  silkscreen extent -15.6,-8.9 3.6,1, body extent -15.6,-8.9 3.6,1, height 7.37
PBD-6 [mm]
  rect 1.5x1.5 hole 1: 1(0,0)
  round 1.5 hole 1: 2(-2.54,0) 3(0,-2.54) 4(-2.54,-2.54) 5(0,-5.08) 6(-2.54,-5.08)
  silkscreen extent -3.81,-6.35 1.27,1.27, body extent -3.81,-6.35 1.27,1.27, height 8.4
PLD-6 [mm]
  rect 1.5x1.5 hole 1: 1(0,0)
  round 1.5 hole 1: 2(2.54,0) 3(0,-2.54) 4(2.54,-2.54) 5(0,-5.08) 6(2.54,-5.08)
  silkscreen extent -1.27,-6.35 3.81,1.27
SO-G16/G6.9 [mm]
  rect 0.6x2.25 smd: 1(-4.445,-4.575) 2(-3.175,-4.575) 3(-1.905,-4.575) 4(-0.635,-4.575) 5(0.635,-4.575) 6(1.905,-4.575) 7(3.175,-4.575) 8(4.445,-4.575) 9(4.445,4.575) 10(3.175,4.575) 11(1.905,4.575) 12(0.635,4.575) 13(-0.635,4.575) 14(-1.905,4.575) 15(-3.175,4.575) 16(-4.445,4.575)
  silkscreen extent -5.42,-4.7 5.27,3.05, body extent -5.28,-3.05 5.28,3.05, height 0.13
SOT-23 [mil]
  rect 20x50 smd: 1(20,-87) 2(94,-87) 3(57,23)
  silkscreen extent 0,-87 114,23
SOT-23-5 [mil]
  rect 20x50 smd: 1(-37.4,0) 2(0,0) 3(37.4,0) 4(37.4,110) 5(-37.4,110)
  silkscreen extent -57,0 57,110, body extent -57,0 57,110, height 59
SWD1-8 [mm]
  rect 1.4x1.4 hole 0.8: 1(0,0)
  round 1.4 hole 0.8: 2(0,-2.54) 3(0,-5.08) 4(0,-7.62) 5(0,-10.16) 6(0,-12.7) 7(0,-15.24) 8(0,-17.78) 9(7.62,-17.78) 10(7.62,-15.24) 11(7.62,-12.7) 12(7.62,-10.16) 13(7.62,-7.62) 14(7.62,-5.08) 15(7.62,-2.54) 16(7.62,0)
  silkscreen extent -1.02,-19.3 8.64,1.52
TQFP64 [mm]
  rect 1.6x0.25 smd: 1(0,0)
  oval 1.6x0.25 smd: 2(0,-0.5) 3(0,-1) 4(0,-1.5) 5(0,-2) 6(0,-2.5) 7(0,-3) 8(0,-3.5) 9(0,-4) 10(0,-4.5) 11(0,-5) 12(0,-5.5) 13(0,-6) 14(0,-6.5) 15(0,-7) 16(0,-7.5) 33(11.4,-7.5) 34(11.4,-7) 35(11.4,-6.5) 36(11.4,-6) 37(11.4,-5.5) 38(11.4,-5) 39(11.4,-4.5) 40(11.4,-4) 41(11.4,-3.5) 42(11.4,-3) 43(11.4,-2.5) 44(11.4,-2) 45(11.4,-1.5) 46(11.4,-1) 47(11.4,-0.5) 48(11.4,0)
  oval 0.25x1.6 smd: 17(1.95,-9.45) 18(2.45,-9.45) 19(2.95,-9.45) 20(3.45,-9.45) 21(3.95,-9.45) 22(4.45,-9.45) 23(4.95,-9.45) 24(5.45,-9.45) 25(5.95,-9.45) 26(6.45,-9.45) 27(6.95,-9.45) 28(7.45,-9.45) 29(7.95,-9.45) 30(8.45,-9.45) 31(8.95,-9.45) 32(9.45,-9.45) 49(9.45,1.95) 50(8.95,1.95) 51(8.45,1.95) 52(7.95,1.95) 53(7.45,1.95) 54(6.95,1.95) 55(6.45,1.95) 56(5.95,1.95) 57(5.45,1.95) 58(4.95,1.95) 59(4.45,1.95) 60(3.95,1.95) 61(3.45,1.95) 62(2.95,1.95) 63(2.45,1.95) 64(1.95,1.95)
  silkscreen extent -0.4,-9.85 11.8,2.35
TRANS-KT814 [mm]
  round 1.8 hole 1: BASE(2.3,0) COLL(0,0) EMIT(-2.3,0)
  silkscreen extent -3.9,-1.4 3.9,1.4, body extent -3.9,-1.4 3.9,1.4, height 13.8
TRANS-KT3102M [mm]
  round 1.4 hole 0.8: BASE(1.25,1.25) COLL(0,0) EMIT(2.5,0)
  silkscreen extent -1.35,-1.35 3.85,2.85, body extent -1.36,-1.35 3.86,2.86, height 8.2

## Part data
C1 C2 C5 C14 C15 C16 C17 C18 C19 C20 C21 C22 C23 C24 C26 C27 C28 C29 C30 C31 C32 C33 C34 C35 C36 C37 C38 C39 C40 C41 C43 C48 C49 C50 C51 C52 C53 C56 C57 C58 C59 C60 C61 C63 C64 C65: library part C
C3 C4 C6 C7 C8 C9 C10 C11 C12 C13: library part Cap, "Capacitor"
C25 C42 C45 C46 C47 C62: library part "C POL"
C44: library part C, "K73-17"
C54 C55: library part c
J1 J2 J3 J4 J5 J6 J7 J8 J9 J10 J11 J14 J15 J17 J18 J19: "Socket, double line, 2.54 mm and 2 mm,"
J16 J28 J29: "2.54 mm jumper"
L3: library part DROSSEL
R1 R3 R5 R24 R25 R26 R27 R28 R29 R30 R31 R32 R33 R34 R35 R36 R37 R38 R39 R40 R43 R44 R49 R50 R51 R52 R53 R54 R55 R56 R57 R58 R59 R60 R61 R62 R63 R64: library part R
R2 R4 R6 R41 R42 R45 R46 R47 R48: library part r
R7 R8 R9 R10 R11 R12 R13 R14 R15 R16 R17 R18 R19 R20 R21 R22 R23: library part Res2, "Resistor"
U2 U6: library part SG-636, "Crystal Oscillator (SMD)"
U4: "Cyclone III Family FPGA, 346 I/O Pins, 4 PLLs, 484-Pin FBGA, Speed Grade 6, Commercial Grade"
U5: library part EPCS1, "Serial configuration device for Cyclone (Altera)"
U7: "10-Bit Digital Temperature Sensors"
U8: "Silicon Serial Number"
U9: "32 Mbit data flash memory"
U10: "8 MHz Rail-to-Rail Operational Amplifiers"
U11: "8-Channel, 125 kSPS, 12-Bit ADC"
VD1 VD2 VD3: "Double diode"
X1 X2 X3 X4 X5 X6 X7 X8 X9 X10 X11 X12 X13 X14 X15 X16 X17 X18 X19 X20: library part DRL

## Via types
v1: diameter 0.6, hole 0.3, Top Layer to Bottom Layer, tented top, 188 vias
v2: diameter 0.9, hole 0.6, Top Layer to Bottom Layer, 100 vias
v3: diameter 0.6, hole 0.3, Top Layer to Bottom Layer, 48 vias

## Nets (pads, with @x,y where several pads share a name; then routed paths per layer and width w, separated by ;. In a path a pad name is that pad's centre, name@x,y a point inside that pad or via, vN(x,y) a via of type N, cw(c..) or ccw(c..) an arc to the next point about the centre after c; other vN are vias at no path point)
+1-2V_MEASURE: C63.2 R59.1 U11.6 | length 35.2
  Top Layer w0.254: R59.1@133.587,63.1 v2(134.7,63.1) 136.3,64.7 142.5,64.7 v2(144.2,66.4) ; U11.6@148.25,85.6 148.25,84.55 148.2,84.5 148.2,80.7 v2(149.5,79.4) C63.2@150.813,79.4
  Bottom Layer w0.254: v2(144.2,66.4) 146.7,68.9 146.8,69 146.8,74.5 149.5,77.2 v2(149.5,79.4)
+1.2V: C18.2 C21.2 C24.2 C27.2 C45.+ C49.2 J20.1 R59.2 U4.E17 U4.F6 U4.J8 U4.J10 U4.J11 U4.J12 U4.J13 U4.J14 U4.K9 U4.K14 U4.L9 U4.L14 U4.M9 U4.M14 U4.N9 U4.P9 U4.P10 U4.P11 U4.P12 U4.P13 U4.T13 U4.U6 U4.U16 U4.U17 U4.V17 | length 96.7
  Top Layer w0.254: v1(97.8,89.3) U4.U6@98.3,89.8 ; v1(97.8,101.3) U4.F6@98.3,100.8 ; v1(99.8,98.3) U4.J8@100.3,97.8 ; v1(100.8,92.3) U4.P9@101.3,92.8 ; v1(100.8,93.3) U4.N9@101.3,93.8 ; v1(100.8,94.3) U4.M9@101.3,94.8 ; v1(100.8,96.3) U4.L9@101.3,95.8 ; v1(100.8,97.3) U4.K9@101.3,96.8 ; v1(101.8,92.3) U4.P10@102.3,92.8 ; v1(101.8,98.3) U4.J10@102.3,97.8 ; v1(102.8,92.3) U4.P11@103.3,92.8 ; v1(102.8,98.3) U4.J11@103.3,97.8 ; U4.P12@104.3,92.8 v1(104.8,92.3) ; U4.J12@104.3,97.8 v1(104.8,98.3) ; v1(104.8,91.3) U4.T13@105.3,90.8 ; U4.P13@105.3,92.8 v1(105.8,92.3) ; U4.J13@105.3,97.8 v1(105.8,98.3) ; U4.M14@106.3,94.8 v1(106.8,94.3) ; U4.L14@106.3,95.8 v1(106.8,96.3) ; U4.K14@106.3,96.8 v1(106.8,97.3) ; U4.J14@106.3,97.8 v1(106.8,98.3) ; U4.U16@108.3,89.8 v1(108.8,89.3) ; U4.V17@109.3,88.8 v1(109.8,88.3) ; U4.U17@109.3,89.8 v1(109.8,89.3) ; U4.E17@109.3,101.8 v1(109.8,102.3)
  Top Layer w0.5: C45.+@132.013,60.958 R59.2@132.013,63.1
  Top Layer w2: v2(131.1,60.1) 132.73,60.1 C45.+@132.8,60.17 132.87,60.1 v2(135.8,60.1) C49.2@135.8,58.697
  Bottom Layer w1: v1(99.8,98.3) 99.8,97.8 100.3,97.3 v1(100.8,97.3) v1(100.8,96.3) v1(100.8,94.3) v1(100.8,93.3) v1(100.8,92.3) v1(101.8,92.3) v1(102.8,92.3) v1(104.8,92.3) v1(105.8,92.3) ; v1(101.8,98.3) v1(102.8,98.3) v1(104.8,98.3) v1(105.8,98.3) v1(106.8,98.3) v1(106.8,97.3) v1(106.8,96.3) v1(106.8,94.3)
  Bottom Layer w2: v2(131.1,60.1) v2(135.8,60.1) 135.8,58.7 137.2,57.3 153,57.3 156.8,53.5 169,53.5 170.8,55.3 170.8,59.3 J20.1@169.4,60.7
  other v2: 134.5,60.1
+2-3V_MEASURE: C60.2 R53.1 R56.2 U11.9 | length 32.3
  Top Layer w0.5: U11.9@150.79,90.985 150.79,91.99 150.9,92.1 152.687,92.1 C60.2@152.7,92.087 R56.2@154.3,92.087 154.313,92.1 v3(155.4,92.1) ; v2(156.6,67.1) R53.1@157.713,67.1
  Bottom Layer w0.5: v3(155.4,92.1) 156.6,90.9 v2(156.6,67.1)
+2-5V_MEASURE: C65.2 R58.1 R61.2 U11.7 | length 30.2
  Top Layer w0.254: R58.1@141.397,63.1 v2(142.7,63.1) ; U11.7@149.52,85.6 149.52,84.42 149.5,84.4 149.5,82.8 ; R61.2@150.813,81.1 v2(149.5,81.1) 149.5,82.8 ; C65.2@150.813,82.8 149.5,82.8
  Bottom Layer w0.254: v2(142.7,63.1) 148,68.4 148,74.2 150.6,76.8 150.6,80 v2(149.5,81.1)
+2.3V: J20.8 R53.2 | length 5.5
  Top Layer w0.5: R53.2@159.287,67.1 160,67.1 J20.8@163.4,63.7
+2.5V: C15.2 C17.2 C20.2 C23.2 C46.+ C50.2 J20.2 L3.1 R24.2 R29.2 R30.2 R58.2 U4.L18 | length 168.5
  Top Layer w0.254: U4.L18@110.3,95.8 v1(110.8,96.3)
  Top Layer w0.5: v2@138.603,60.303 R58.2@138.603,63.1
  Top Layer w2: v2(138.3,60) 139.93,60 140,60.07 140.07,60 v2(143,60) C50.2@143,58.597
  Mid-Layer 1 w0.5: v1(110.8,96.3) 110.8,95.9 111.4,95.3 112.2,95.3 115,92.5 115,88.6 118.3,85.3 v2(118.3,82)
  Mid-Layer 1 w2: v2(138.3,60) v2(143,60) 143,58.6 144.3,57.3 153,57.3 156.8,53.5 161.7,53.5 163.4,55.2 163.4,57.2 166.4,60.2 J20.2@166.4,60.7
  Bottom Layer w0.5: R24.2@73.387,97.4 74.4,97.4 74.8,97.4 75.7,96.5 R29.2@76.213,96.5 ; 74.8,93.3 C15.2@76.213,93.3 ; 74.8,94.9 R30.2@76.213,94.9 ; v1(110.8,96.3) 110.8,95.813 C20.2@111.313,95.3
  Bottom Layer w1: 87.1,79.6 87.3,79.4 C23.2@87.3,78.787 ; C17.2@117.4,78.787 117.487,78.787 118.3,79.6 v2(118.3,82) 119.073,82.773 L3.1@119.073,86.1
  Bottom Layer w2: 74.8,97.4 74.8,91.9 87.1,79.6 118.3,79.6 132.9,65 136.4,65 138.3,63.1 v2(138.3,60) v2(143,60)
  other v2: 141.7,60
+3-3V_MEASURE: C64.2 R57.1 R60.2 U11.8 | length 30.3
  Top Layer w0.254: v2(144.5,63.1) R57.1@145.803,63.1 ; U11.8@150.79,85.6 150.79,84.61 151,84.4 v3(151.6,84.4) 152.587,84.4 C64.2@152.7,84.513 152.813,84.4 154.187,84.4 R60.2@154.3,84.513
  Bottom Layer w0.254: v2(144.5,63.1) 149.2,67.8 149.2,73.9 151.6,76.3 v3(151.6,84.4)
+3.3V: C3.2 C4.2 C5.2 C6.2 C14.2 C16.2 C19.2 C22.2 C26.2 C28.2 C31.2 C33.2 C35.2 C36.2 C37.2 C38.2 C39.2 C43.1 C47.+ C51.2 C61.2 C62.+ J20.3 J24.6 J27.4 L1.1 R5.1 R13.2 R14.2 R15.2 R16.2 R17.2 R18.2 R19.2 R20.2 R22.1 R23.1 R25.2 R27.2 R34.2 R35.2 R36.2 R57.2 R62.2 R63.2 R64.1 U2.1 U2.4 U3.3 U3.4 U3.8 U3.40 U3.51 U4.A2 U4.A21 U4.AA6 U4.AB2 U4.AB21 U4.D4 U4.D5 U4.D9 U4.D11 U4.D12 U4.D14 U4.D16 U4.D18 U4.E8 U4.E19 U4.F4 U4.G19 U4.H4 U4.J20 U4.K4 U4.L19 U4.N4 U4.P18 U4.R4 U4.T19 U4.U4 U4.V19 U4.W4 U4.W5 U4.W9 U4.W11 U4.W12 U4.W16 U4.W18 U4.Y14 U4.Y19 U5.3 U5.7 U5.8 U6.1 U6.4 U7.3 U8.2 U9.6 U11.3 | length 172.7
  Top Layer w0.254: v1(93.8,84.3) U4.AB2@94.3,84.8 ; v1(93.8,106.3) U4.A2@94.3,105.8 ; v1(95.8,87.3) U4.W4@96.3,87.8 ; v1(95.8,89.3) U4.U4@96.3,89.8 ; v1(95.8,91.3) U4.R4@96.3,91.8 ; v1(95.8,93.3) U4.N4@96.3,93.8 ; v1(95.8,96.3) U4.K4@96.3,96.8 ; v1(95.8,99.3) U4.H4@96.3,98.8 ; v1(95.8,101.3) U4.F4@96.3,100.8 ; v1(95.8,103.3) U4.D4@96.3,102.8 ; v1(96.8,87.3) U4.W5@97.3,87.8 ; v1(96.8,103.3) U4.D5@97.3,102.8 ; v1(97.8,85.3) U4.AA6@98.3,85.8 ; v1(99.8,102.3) U4.E8@100.3,101.8 ; v1(100.8,87.3) U4.W9@101.3,87.8 ; v1(100.8,103.3) U4.D9@101.3,102.8 ; v1(102.8,87.3) U4.W11@103.3,87.8 ; v1(102.8,103.3) U4.D11@103.3,102.8 ; U4.W12@104.3,87.8 v1(104.8,87.3) ; U4.D12@104.3,102.8 v1(104.8,103.3) ; U4.Y14@106.3,86.8 v1(106.8,86.3) ; U4.D14@106.3,102.8 v1(106.8,103.3) ; U4.W16@108.3,87.8 v1(108.8,87.3) ; U4.D16@108.3,102.8 v1(108.8,103.3) ; U4.W18@110.3,87.8 v1(110.8,87.3) ; U4.P18@110.3,92.8 v1(110.8,92.3) ; U4.D18@110.3,102.8 v1(110.8,103.3) ; v1(110.8,100.3) U4.G19@111.3,99.8 v1(111.8,100.3) ; U4.Y19@111.3,86.8 v1(111.8,86.3) ; U4.V19@111.3,88.8 v1(111.8,88.3) ; U4.T19@111.3,90.8 v1(111.8,90.3) ; U4.L19@111.3,95.8 v1(111.8,96.3) ; U4.E19@111.3,101.8 v1(111.8,102.3) ; U4.J20@112.3,97.8 v1(112.8,98.3) ; U4.AB21@113.3,84.8 v1(113.8,84.3) ; U4.A21@113.3,105.8 v1(113.8,106.3) ; v2(121.6,104.6) 121.75,104.45 U3.51@123.45,104.45 ; U3.3@126.4,96 126.4,94.7 v2(126.8,94.3) 126.9,94.4 U3.4@126.9,96 ; v2(128.9,94.3) U3.8@128.9,96 ; U3.40@129.4,107.4 v2(129.4,109)
  Top Layer w0.5: C38.2@51.9,87.087 v2(51.9,88.2) ; 51.91,87.61 U8.2@53.512,87.61 ; v2(53.4,80) 54.487,80 R34.2@54.5,80.013 R36.2@58.1,80.013 ; U9.6@65.485,84.66 67.353,84.66 C43.1@67.5,84.513 67.513,84.5 v2(68.6,84.5) ; v2(69.9,80.9) U6.1@71.8,80.9 U6.4@71.8,84.9 ; U5.3@76.3,100.06 77.76,100.06 79.03,101.33 ; R5.1@80.397,69.6 v2(81.7,69.6) ; U5.7@81.685,101.33 79.03,101.33 ; U5.8@81.685,102.6 v2(79,102.6) 79.03,102.57 79.03,101.33 ; v2(98.8,69.5) R64.1@98.8,70.613 ; U2.4@124.8,91.4 U2.1@124.8,87.4 124.6,87.2 v2(124.6,84.7) C5.2@125.903,84.7 ; U7.3@136.5,92.45 138.363,92.45 C37.2@138.513,92.3 ; C37.2@138.5,92.287 C37.2@138.513,92.3 ; v2(139.6,92.3) C37.2@138.513,92.3 ; L1.1@140.34,99.7 v2(141.6,99.7) ; v2(141.3,81.1) C62.+@142.73,81.1 142.73,81.917 C61.2@143.913,83.1 143.913,83.913 144.44,84.44 U11.3@144.44,85.6 ; v2@148.597,60.403 R57.2@148.597,63.1 ; v2(161.8,92.5) 163.413,92.5 ; R23.1@163.413,91.3 163.413,92.5 ; R22.1@163.413,93.8 163.413,92.5
  Top Layer w2: v2(145.5,60.1) 147.13,60.1 C47.+@147.2,60.17 147.27,60.1 v2(148.9,60.1) v2(150.2,60.1) ; C51.2@150.2,58.697 C51.2@150.2,58.797 v2(150.2,60.1) ; J20.3@163.4,60.7 163.4,55.2 161.7,53.5 156.8,53.5 v2(150.2,60.1)
  Bottom Layer w0.5: R20.2@57.413,91.1 R19.2@57.413,93.7 R18.2@57.413,96.2 R17.2@57.413,98.7 R16.2@57.413,101.3 R15.2@57.413,103.8 R14.2@57.413,106.4 R13.2@57.413,108.9 ; v2(69.9,80.9) C39.2@72.803,80.9 ; R25.2@73.387,100 v3(74.4,100) ; C14.2@79,101.487 v2(79,102.6) ; R27.2@85.6,101.487 v2(85.6,102.6) ; v1(93.8,84.3) 94.087,84.013 C19.2@94.087,83.2 ; v1(93.8,106.3) 94.087,106.587 C16.2@94.087,107.4 ; v1(95.8,91.3) 96.087,91.587 C31.2@96.087,92.3 96.087,93.013 v1(95.8,93.3) ; v1(95.8,96.3) 95.8,97.687 C28.2@95.687,97.8 95.8,97.913 v1(95.8,99.3) ; v1(100.8,103.3) 101.087,103.013 C36.2@101.8,103.013 102.513,103.013 v1(102.8,103.3) ; v1(102.8,87.3) 103.387,87.887 C33.2@103.8,87.887 104.213,87.887 v1(104.8,87.3) ; v1(111.8,96.3) 111.8,97.087 C35.2@112.013,97.3 112.013,97.413 112.8,98.2 v1(112.8,98.3) ; C22.2@113.513,83.2 113.513,84.013 v1(113.8,84.3) ; C26.2@113.513,107.4 113.513,106.587 v1(113.8,106.3) ; v2(121.6,104.6) C4.2@122.713,104.6 ; v2(126.8,94.3) v2(128.9,94.3) ; 127.9,94.3 C6.2@127.9,95.213 ; C3.2@129.4,107.887 v2(129.4,109) ; R62.2@135.887,90.6 137.9,90.6 v2(139.6,92.3) 139.5,92.4 R63.2@135.887,92.4
  other v2: 57.413,100
+5-5V_MEASURE: C58.2 R51.1 R54.2 U11.10 | length 13.9
  Top Layer w0.5: U11.10@149.52,90.985 149.52,89.88 151.1,88.3 157.3,88.3 ; C58.2@156.9,89.413 156.903,89.41 156.903,88.903 157.3,88.903 ; R51.1@157.4,86.913 R51.1@157.413,86.9 157.3,87.013 157.3,88.3 ; R54.2@158.7,88.903 157.3,88.903 ; 157.3,88.3 157.3,88.903
+5.5V: C2.2 J20.6 R47.1 R51.2 VD1.1 | length 152.6
  Top Layer w0.5: C2.2@87.6,59.597 v2(87.6,60.9) 88.7,62 88.7,62.5 88.492,62.708 VD1.1@87.71,62.708 ; R51.2@158.987,86.9 v2(160.1,86.9)
  Mid-Layer 2 w1: v2(87.6,60.9) 90,58.5 90,54.1 91.2,52.9 168.9,52.9 171.5,55.5 171.5,61.6 J20.6@169.4,63.7
  Mid-Layer 2 w1.5: v2(150.5,100.7) 160.1,91.1 v2(160.1,86.9) 160.1,71 165.7,65.4 167.7,65.4 J20.6@169.4,63.7
  Bottom Layer w0.5: v2(150.5,100.7) R47.1@151.613,100.7
+12.5V: J20.9
-5-5V_MEASURE: C57.2 R50.2 U11.11 | length 15.9
  Top Layer w0.254: U11.11@148.25,90.985 148.25,91.95 ; 148.3,92 v3(148.3,92.6)
  Mid-Layer 1 w0.254: v3(148.3,92.6) 148.3,92.8 v3(156.2,100.7)
  Bottom Layer w0.254: v3(156.2,100.7) C57.2@157.313,100.7 R50.2@157.313,102.5
-5.5V: J20.7 R42.1 R48.1 | length 52.3
  Top Layer w0.5: R48.1@151.487,107.7 v2(152.6,107.7) 152.9,107.4 R42.1@153.903,107.4
  Mid-Layer 1 w1.5: v2(152.6,107.7) 158.4,101.9 158.4,72.7 166.4,64.7 J20.7@166.4,63.7
ADCBRD0_MISO: J2.2 U4.U21 | length 65.3
  Top Layer w0.2: U4.U21@113.3,89.8 113.8,89.3 117.9,89.3 118.2,89
  Top Layer w0.254: 118.2,89 128.8,78.4 140.2,78.4 142.7,75.9 161.5,75.9 166.5,70.9 168.94,70.9 J2.2@170.24,72.2
ADCBRD0_MOSI: J2.3 U4.V22 | length 61.3
  Top Layer w0.2: U4.V22@114.3,88.8 117.7,88.8 118,88.5
  Top Layer w0.254: 118,88.5 128.6,77.9 139.9,77.9 142.4,75.4 160.76,75.4 166.5,69.66 J2.3@167.7,69.66
ADCBRD0_NCS: J2.1 U4.U22 | length 60.7
  Top Layer w0.2: U4.U22@114.3,89.8 118.1,89.8 118.4,89.5
  Top Layer w0.254: 118.4,89.5 129,78.9 140.5,78.9 143,76.4 162.2,76.4 166.4,72.2 J2.1@167.7,72.2
ADCBRD0_SCLK: J2.4 U4.V21 | length 65.9
  Top Layer w0.2: U4.V21@113.3,88.8 113.8,88.3 117.5,88.3 117.8,88
  Top Layer w0.254: 117.8,88 128.4,77.4 139.6,77.4 142.1,74.9 160.1,74.9 166.6,68.4 168.98,68.4 J2.4@170.24,69.66
ADCBRD0_STROBE: J2.5 U4.W22 | length 62
  Top Layer w0.2: U4.W22@114.3,87.8 117.3,87.8 117.6,87.5
  Top Layer w0.254: 117.6,87.5 128.2,76.9 139.3,76.9 141.8,74.4 159.32,74.4 166.6,67.12 J2.5@167.7,67.12
ADCBRD1_MISO: J3.2 U4.Y22 | length 46.7
  Top Layer w0.2: U4.Y22@114.3,86.8 116.9,86.8 117.2,86.5
  Top Layer w0.254: 117.2,86.5 127.8,75.9 138.7,75.9 143.7,70.9 152.54,70.9 J3.2@153.84,72.2
ADCBRD1_MOSI: J3.3 U4.Y21 | length 45.1
  Top Layer w0.2: U4.Y21@113.3,86.8 113.8,86.3 116.7,86.3 117,86
  Top Layer w0.254: 117,86 127.6,75.4 138.4,75.4 144.14,69.66 J3.3@151.3,69.66
ADCBRD1_NCS: J3.1 U4.W21 | length 44.5
  Top Layer w0.2: U4.W21@113.3,87.8 113.8,87.3 117.1,87.3 117.4,87
  Top Layer w0.254: 117.4,87 128,76.4 139,76.4 143.2,72.2 J3.1@151.3,72.2
ADCBRD1_SCLK: J3.4 U4.AA22 | length 47.3
  Top Layer w0.2: U4.AA22@114.3,85.8 116.5,85.8 116.8,85.5
  Top Layer w0.254: 116.8,85.5 127.4,74.9 138.1,74.9 144.6,68.4 152.58,68.4 J3.4@153.84,69.66
ADCBRD1_STROBE: J3.5 U4.AA21 | length 45.7
  Top Layer w0.2: U4.AA21@113.3,85.8 113.8,85.3 116.3,85.3 116.6,85
  Top Layer w0.254: 116.6,85 127.2,74.4 137.8,74.4 145.08,67.12 J3.5@151.3,67.12
ADCBRD2_MISO: J4.2 U4.AB20 | length 32.7
  Top Layer w0.2: U4.AB20@112.3,84.8 112.3,82.6 112.7,82.2
  Top Layer w0.254: 112.7,82.2 113.4,81.5 116.7,81.5 127.3,70.9 136.14,70.9 J4.2@137.44,72.2
ADCBRD2_MOSI: J4.3 U4.AA18 | length 32.7
  Top Layer w0.2: U4.AA18@110.3,85.8 110.8,85.3 110.8,82.8 111.2,82.4
  Top Layer w0.254: 111.2,82.4 112.6,81 116.4,81 127.74,69.66 J4.3@134.9,69.66
ADCBRD2_NCS: J4.1 U4.AA20 | length 29.7
  Top Layer w0.2: U4.AA20@112.3,85.8 112.8,85.3 112.8,82.8 113.2,82.4
  Top Layer w0.254: 113.2,82.4 113.6,82 117,82 126.8,72.2 J4.1@134.9,72.2
ADCBRD2_SCLK: J4.4 U4.AB18 | length 35.7
  Top Layer w0.2: U4.AB18@110.3,84.8 110.3,82.6 110.7,82.2
  Top Layer w0.254: 110.7,82.2 112.4,80.5 116.1,80.5 128.2,68.4 136.18,68.4 J4.4@137.44,69.66
ADCBRD2_STROBE: J4.5 U4.AB17 | length 34.1
  Top Layer w0.2: U4.AB17@109.3,84.8 109.3,82.8 109.7,82.4
  Top Layer w0.254: 109.7,82.4 112.1,80 115.8,80 128.68,67.12 J4.5@134.9,67.12
ADCBRD3_MISO: J5.2 U4.AB16 | length 22
  Top Layer w0.2: U4.AB16@108.3,84.8 108.3,82.4 108.7,82
  Top Layer w0.254: 108.7,82 116.6,74.1 116.6,71.5 117.2,70.9 119.74,70.9 J5.2@121.04,72.2
ADCBRD3_MOSI: J5.3 U4.AA15 | length 21.5
  Top Layer w0.2: U4.AA15@107.3,85.8 107.8,85.3 107.8,82.2 108.2,81.8
  Top Layer w0.254: 108.2,81.8 116,74 116,70.9 117.24,69.66 J5.3@118.5,69.66
ADCBRD3_NCS: J5.1 U4.AA16 | length 17.8
  Top Layer w0.2: U4.AA16@108.3,85.8 108.8,85.3 108.8,82.6 109.2,82.2
  Top Layer w0.254: 109.2,82.2 117.2,74.2 117.2,73.5 J5.1@118.5,72.2
ADCBRD3_SCLK: J5.4 U4.AB15 | length 24.9
  Top Layer w0.2: U4.AB15@107.3,84.8 107.3,82 107.7,81.6
  Top Layer w0.254: 107.7,81.6 115.4,73.9 115.4,70.2 117.2,68.4 119.78,68.4 J5.4@121.04,69.66
ADCBRD3_STROBE: J5.5 U4.AB14 | length 23.5
  Top Layer w0.2: U4.AB14@106.3,84.8 106.3,82.3 106.7,81.9
  Top Layer w0.254: 106.7,81.9 114.8,73.8 114.8,69.5 117.18,67.12 J5.5@118.5,67.12
ADCBRD4_MISO: J6.2 U4.AB10 | length 13.6
  Top Layer w0.2: U4.AB10@102.3,84.8 102.3,82.6 102.7,82.2
  Top Layer w0.254: 102.7,82.2 104.64,80.26 J6.2@104.64,72.2
ADCBRD4_MOSI: J6.3 U4.AA9 | length 17.5
  Top Layer w0.2: U4.AA9@101.3,85.8 101.8,85.3 101.8,82.4 102.2,82
  Top Layer w0.254: J6.3@102.1,69.66 103.4,70.96 103.4,80.8 102.2,82
ADCBRD4_NCS: J6.1 U4.AB9 | length 12.9
  Top Layer w0.2: U4.AB9@101.3,84.8 101.3,82.2 101.7,81.8
  Top Layer w0.254: 101.7,81.8 102.1,81.4 J6.1@102.1,72.2
ADCBRD4_SCLK: J6.4 U4.AA10 | length 18.2
  Top Layer w0.2: U4.AA10@102.3,85.8 102.8,85.3 102.8,82.8 103.2,82.4
  Top Layer w0.254: 103.2,82.4 105.9,79.7 105.9,70.92 J6.4@104.64,69.66
ADCBRD4_STROBE: J6.5 U4.AB8 | length 18.4
  Top Layer w0.2: U4.AB8@100.3,84.8 100.3,82.5 100.7,82.1
  Top Layer w0.254: 100.7,82.1 100.8,82 100.8,68.42 J6.5@102.1,67.12
ADCBRD5_MISO: J7.2 U4.AB4 | length 15.9
  Top Layer w0.2: 95.9,82.2 96.3,82.6 U4.AB4@96.3,84.8
  Top Layer w0.254: J7.2@88.24,72.2 89.5,73.46 89.5,75.8 95.9,82.2
ADCBRD5_MOSI: J7.3 U4.AA5 | length 22.4
  Top Layer w0.2: 96.4,82 96.8,82.4 96.8,85.3 U4.AA5@97.3,85.8
  Top Layer w0.254: J7.3@85.7,69.66 86.94,70.9 89.5,70.9 90.1,71.5 90.1,75.7 96.4,82
ADCBRD5_NCS: J7.1 U4.AA4 | length 18
  Top Layer w0.2: 95.4,82.4 95.8,82.8 95.8,85.3 U4.AA4@96.3,85.8
  Top Layer w0.254: J7.1@85.7,72.2 85.7,72.7 95.4,82.4
ADCBRD5_SCLK: J7.4 U4.AB5 | length 19.6
  Top Layer w0.2: 96.9,81.8 97.3,82.2 U4.AB5@97.3,84.8
  Top Layer w0.254: J7.4@88.24,69.66 89.46,69.66 90.7,70.9 90.7,75.6 96.9,81.8
ADCBRD5_STROBE: J7.5 U4.AB7 | length 24.8
  Top Layer w0.2: 98.9,82.4 99.3,82.8 U4.AB7@99.3,84.8
  Top Layer w0.254: J7.5@85.7,67.12 86.98,68.4 89.5,68.4 91.3,70.2 91.3,74.8 98.9,82.4
ADCBRD6_MISO: J8.2 U4.Y1 | length 27.5
  Top Layer w0.2: 90.2,86.3 90.7,86.8 U4.Y1@93.3,86.8
  Top Layer w0.254: J8.2@71.84,72.2 74.5,72.2 78.2,75.9 79.8,75.9 90.2,86.3
ADCBRD6_MOSI: J8.3 U4.Y2 | length 32.1
  Top Layer w0.2: 90.4,85.8 90.9,86.3 93.8,86.3 U4.Y2@94.3,86.8
  Top Layer w0.254: J8.3@69.3,69.66 70.54,70.9 74,70.9 78.5,75.4 80,75.4 90.4,85.8
ADCBRD6_NCS: J8.1 U4.W2 | length 31.5
  Top Layer w0.2: 90,86.8 90.5,87.3 93.8,87.3 U4.W2@94.3,87.8
  Top Layer w0.254: J8.1@69.3,72.2 70.6,73.5 75,73.5 77.9,76.4 79.6,76.4 90,86.8
ADCBRD6_SCLK: J8.4 U4.AA1 | length 28.1
  Top Layer w0.2: 90.6,85.3 91.1,85.8 U4.AA1@93.3,85.8
  Top Layer w0.254: J8.4@71.84,69.66 73.56,69.66 78.8,74.9 80.2,74.9 90.6,85.3
ADCBRD6_STROBE: J8.5 U4.AA2 | length 32.7
  Top Layer w0.2: 90.8,84.8 91.3,85.3 93.8,85.3 U4.AA2@94.3,85.8
  Top Layer w0.254: J8.5@69.3,67.12 70.58,68.4 73.1,68.4 79.1,74.4 80.4,74.4 90.8,84.8
ADCBRD7_MISO: J9.2 U4.U2 | length 46.2
  Top Layer w0.2: 89.2,88.8 89.7,89.3 93.8,89.3 U4.U2@94.3,89.8
  Top Layer w0.254: J9.2@55.44,72.2 58.1,72.2 64.3,78.4 78.8,78.4 89.2,88.8
ADCBRD7_MOSI: J9.3 U4.V1 | length 48.3
  Top Layer w0.2: 89.4,88.3 89.9,88.8 U4.V1@93.3,88.8
  Top Layer w0.254: J9.3@52.9,69.66 54.14,70.9 57.6,70.9 64.6,77.9 79,77.9 89.4,88.3
ADCBRD7_NCS: J9.1 U4.U1 | length 47.7
  Top Layer w0.2: 89,89.3 89.5,89.8 U4.U1@93.3,89.8
  Top Layer w0.254: J9.1@52.9,72.2 54.2,73.5 58.6,73.5 64,78.9 78.6,78.9 89,89.3
ADCBRD7_SCLK: J9.4 U4.V2 | length 46.8
  Top Layer w0.2: 89.6,87.8 90.1,88.3 93.8,88.3 U4.V2@94.3,88.8
  Top Layer w0.254: J9.4@55.44,69.66 57.16,69.66 64.9,77.4 79.2,77.4 89.6,87.8
ADCBRD7_STROBE: J9.5 U4.W1 | length 49
  Top Layer w0.2: 89.8,87.3 90.3,87.8 U4.W1@93.3,87.8
  Top Layer w0.254: J9.5@52.9,67.12 54.18,68.4 56.7,68.4 65.2,76.9 79.4,76.9 89.8,87.3
AGND: C1.1 C44.1 C48.1 C52.1 C53.1 C54.1 C55.1 J1.3 J1.4 J10.3 J10.4 J11.3 J11.4 J12.3 J12.4 J12.5 J12.6 J14.3 J14.4 J15.3 J15.4 J17.3 J17.4 J18.3 J18.4 J19.3 J19.4 J20.4 J20.5 J20.10 R4.1 R6.2 R39.2 R43.1 R44.1 VD3.1 VD3.2 | length 37.1
  Top Layer w0.5: VD3.2@138.99,106.712 138.288,106.712 137.9,107.1 137.9,108.2 138.292,108.592 VD3.1@138.99,108.592 ; C55.1@151.487,109.3 v2(152.6,109.3) ; C53.1@158.887,109.3 v2(160,109.3)
  Top Layer w1: C48.1@148.397,115.8 151.16,115.8 J10.3@151.3,115.66
  Top Layer w2: J20.4@160.4,60.7 J20.5@157.4,60.7 ; J20.5@157.4,60.7 155.5,60.7 155.5,63.7 J20.10@157.4,63.7 J20.5@157.4,60.7
  Bottom Layer w0.5: v2(144.2,108.3) 145.313,108.3 ; R43.1@145.313,107.3 C52.1@145.313,109.3 ; v2(150.5,102.5) C54.1@151.613,102.5 ; R44.1@158.887,109.3 v2(160,109.3)
  Bottom Layer w1: J17.4@88.24,115.66 88.477,115.897 R4.1@91.1,115.897 ; C1.1@99.3,115.897 101.863,115.897 J15.3@102.1,115.66 ; R6.2@132.497,118.2 132.497,116.803 133.64,115.66 J11.3@134.9,115.66
  other v2: 137.9,107.6
ASDO: J27.9 U4.D1 U5.5 | length 33.3
  Top Layer w0.2: 89.9,103.2 90.3,102.8 U4.D1@93.3,102.8
  Top Layer w0.254: J27.9@69.8,105.06 70.7,105.06 70.754,105.114 87.986,105.114 89.9,103.2 ; U5.5@81.685,98.79 82.61,98.79 82.62,98.8 v3(84.2,98.8)
  Bottom Layer w0.254: v3(84.2,98.8) 84.2,104.6 v3(84.2,105.1)
CALIBRATION: J1.5 J1.6 J10.5 J10.6 J11.5 J11.6 J14.5 J14.6 J15.5 J15.6 J16.1 J17.5 J17.6 J18.5 J18.6 J19.5 J19.6 R2.2 R4.2 | length 159.5
  Bottom Layer w1: J19.5@52.9,113.12 52.9,110.9 55.44,110.9 ; J19.6@55.44,113.12 55.44,110.9 ; J18.5@69.3,113.12 69.3,110.9 ; J18.6@71.84,113.12 71.84,110.9 ; R2.2@83.1,113.103 83.1,110.9 ; J17.5@85.7,113.12 85.7,110.9 ; J17.6@88.24,113.12 88.24,110.9 ; R4.2@91.1,113.103 91.1,110.9 ; 93.9,110.88 93.9,110.9 ; J16.1@93.9,113.1 93.9,110.9 ; J15.5@102.1,113.12 102.1,110.9 ; J15.6@104.64,113.12 104.64,110.9 ; J14.5@118.5,113.12 118.5,110.9 ; J14.6@121.04,113.12 121.04,110.9 ; J11.5@134.9,113.12 134.9,110.9 ; J11.6@137.44,113.12 137.44,110.9 ; J10.5@151.3,113.12 151.3,110.9 ; J10.6@153.84,113.12 153.84,110.9 ; J1.5@167.7,113.12 167.7,110.9 ; J1.6@170.24,113.12 170.24,110.9 167.7,110.9 ; 55.44,110.9 69.3,110.9 ; 69.3,110.9 71.84,110.9 ; 71.84,110.9 83.1,110.9 ; 83.1,110.9 85.7,110.9 ; 85.7,110.9 88.24,110.9 ; 88.24,110.9 91.1,110.9 ; 91.1,110.9 93.9,110.9 ; 93.9,110.9 102.1,110.9 ; 102.1,110.9 104.64,110.9 ; 104.64,110.9 118.5,110.9 ; 118.5,110.9 121.04,110.9 ; 121.04,110.9 134.9,110.9 ; 134.9,110.9 137.44,110.9 ; 137.44,110.9 151.3,110.9 ; 151.3,110.9 153.84,110.9 ; 153.84,110.9 167.7,110.9
CLOCK20MHZ: U4.G1 U4.G22 U6.3 | length 54.7
  Top Layer w0.2: v3(90.8,99.1) 90.8,99.3 91.3,99.8 U4.G1@93.3,99.8 ; U4.G22@114.3,99.8 115.6,99.8 v3(115.8,100)
  Top Layer w0.254: U6.3@76.8,84.9 78.6,84.9 81.2,87.5 v3(85.9,87.5)
  Mid-Layer 1 w0.254: v3(90.8,99.1) 91.9,100.2 97.9,100.2 98.5,99.6 99.1,99.6 99.7,100.2 108.9,100.2 109.5,99.6 115.4,99.6 v3(115.8,100)
  Bottom Layer w0.2: v3(85.9,87.5) 88.3,89.9 88.3,96.6 v3(90.8,99.1)
COL: U3.62 U4.L21 | length 11.5
  Top Layer w0.2: U4.L21@113.3,95.8 113.8,96.3 117,96.3 117.4,96.7
  Top Layer w0.254: 117.4,96.7 119.2,98.5 119.9,98.5 120.35,98.95 U3.62@123.45,98.95
CONF_DONE: J27.3 R24.1 U4.M18 | length 45.4
  Top Layer w0.2: U4.M18@110.3,94.8 v1(110.8,94.3)
  Mid-Layer 1 w0.2: 90.6,96.9 96.2,96.9 96.8,96.3 98.3,96.3 99.3,95.3 109.8,95.3 v1(110.8,94.3)
  Mid-Layer 1 w0.254: J27.3@69.8,97.44 70.74,96.5 74.8,96.5 75.5,96.5 75.9,96.9 90.6,96.9
  Bottom Layer w0.254: J27.3@69.8,97.44 69.84,97.4 R24.1@71.813,97.4
CRS: U3.63 U4.L22 | length 10.2
  Top Layer w0.2: U4.L22@114.3,95.8 117.2,95.8 117.6,96.2
  Top Layer w0.254: 117.6,96.2 119.4,98 120.1,98 120.55,98.45 U3.63@123.45,98.45
DATA: J27.7 U4.K1 U5.2 | length 45.3
  Top Layer w0.2: 88.4,96.4 88.8,96.8 U4.K1@93.3,96.8
  Top Layer w0.254: v3(68.5,91.7) 72.4,91.7 73.8,93.1 75.4,93.1 76.8,94.5 83.8,94.5 84.1,94.8 86.8,94.8 88.4,96.4 ; J27.7@69.8,102.52 74.08,102.52 75.27,101.33 U5.2@76.3,101.33
  Bottom Layer w0.254: v3(68.5,91.7) 68.5,101.22 J27.7@69.8,102.52